# Altium PCB Controller_Ryuji.PcbDoc
Units mm, origin at the board's own origin, x right, y up, seen from the top; angles counter-clockwise.
Board outline 83.98 x 84 mm, 6 copper layers (TOP, 5V, VS, SIGNALS, GND, BOTTOM), stack 1.597 mm thick; 43 components, 116 nets, 314 pads, 11 vias.
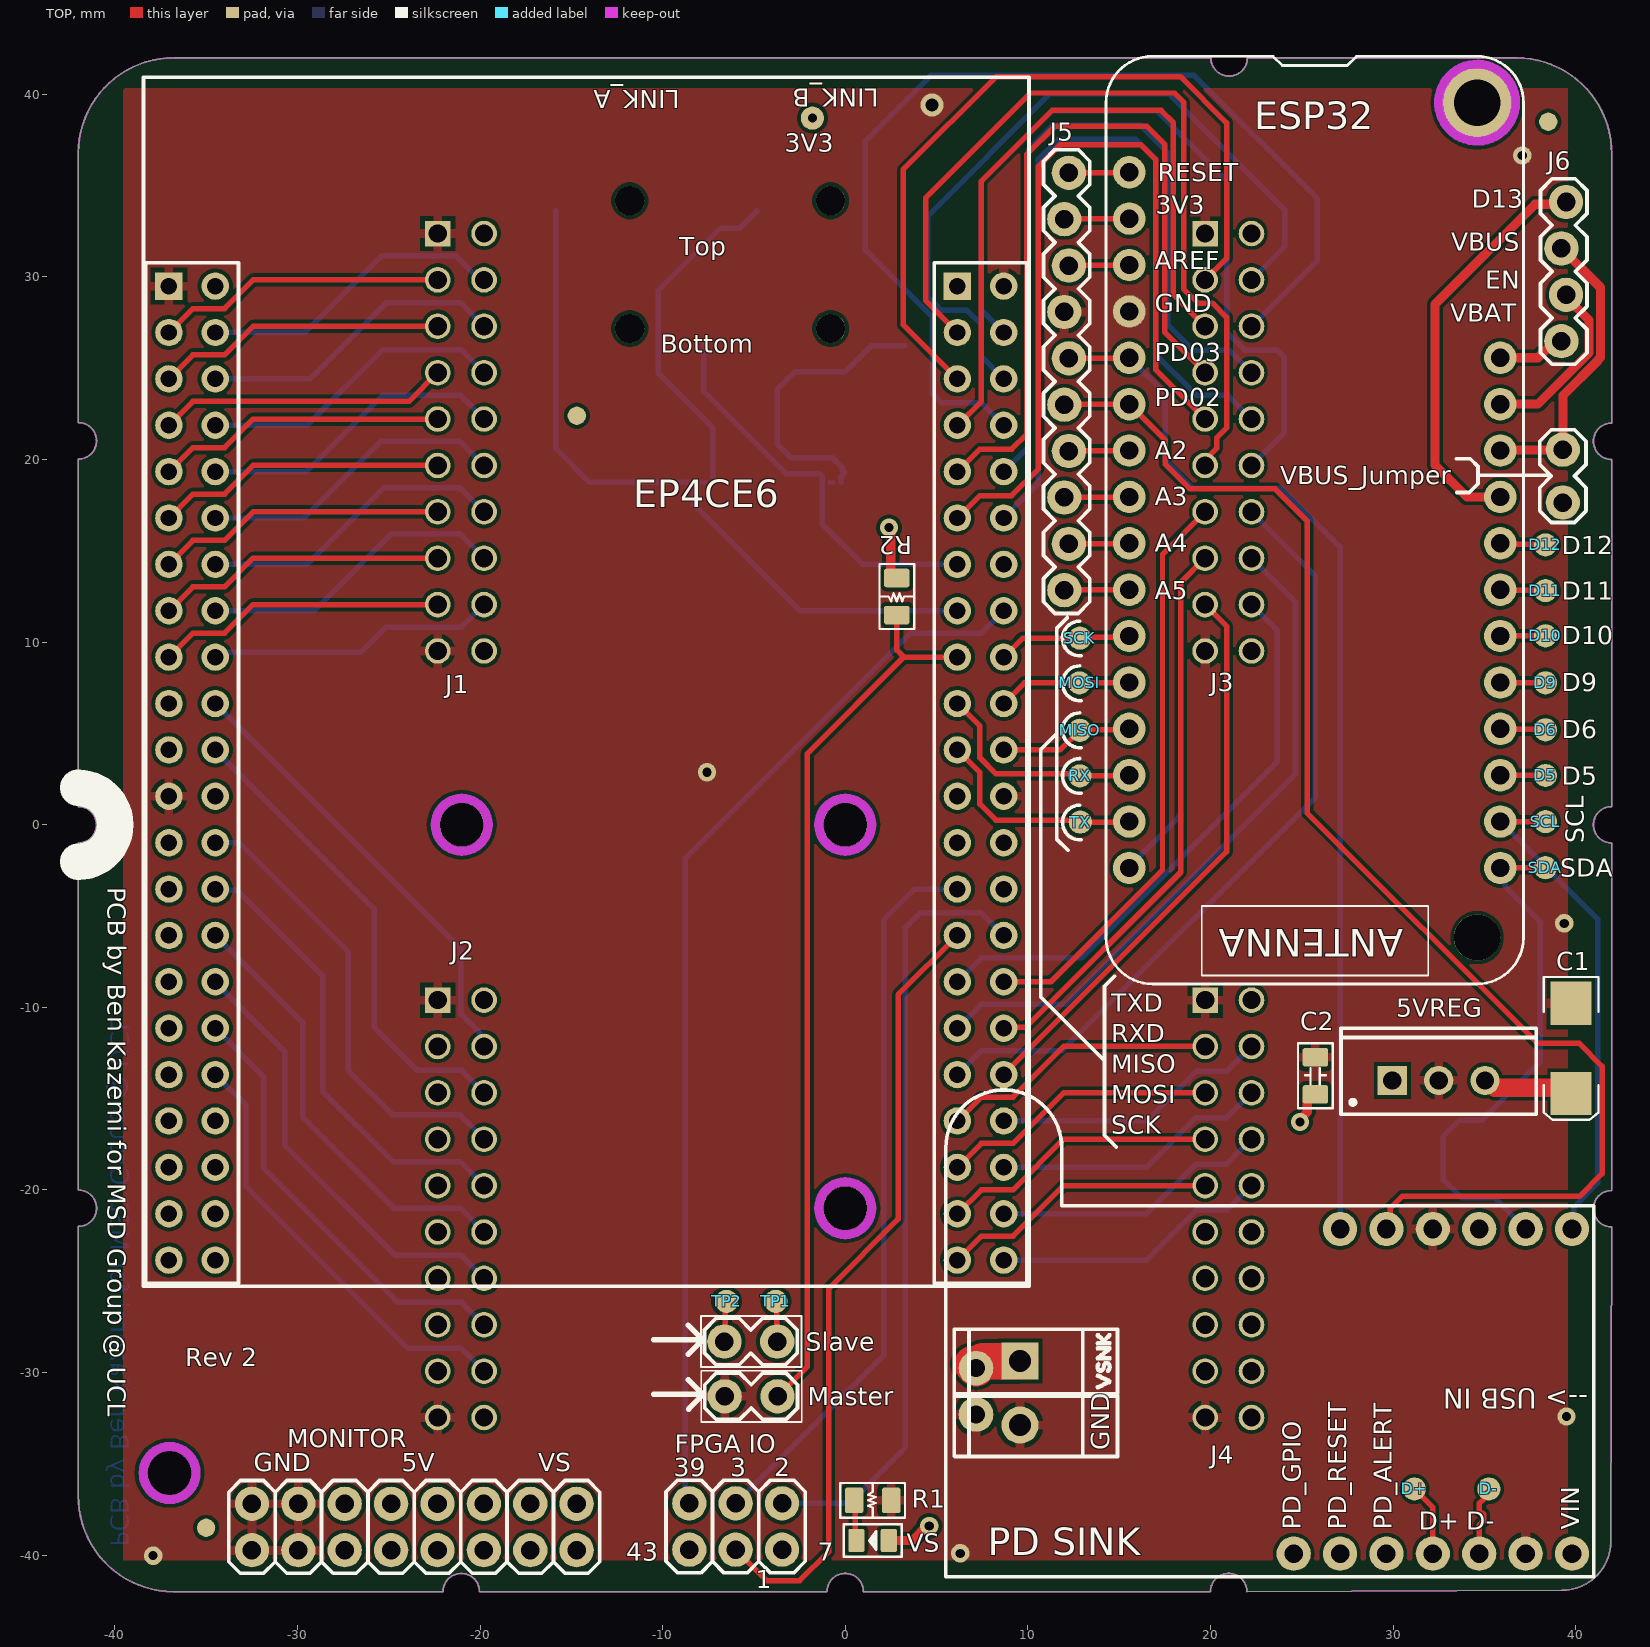
[diagram p0: TOP view]
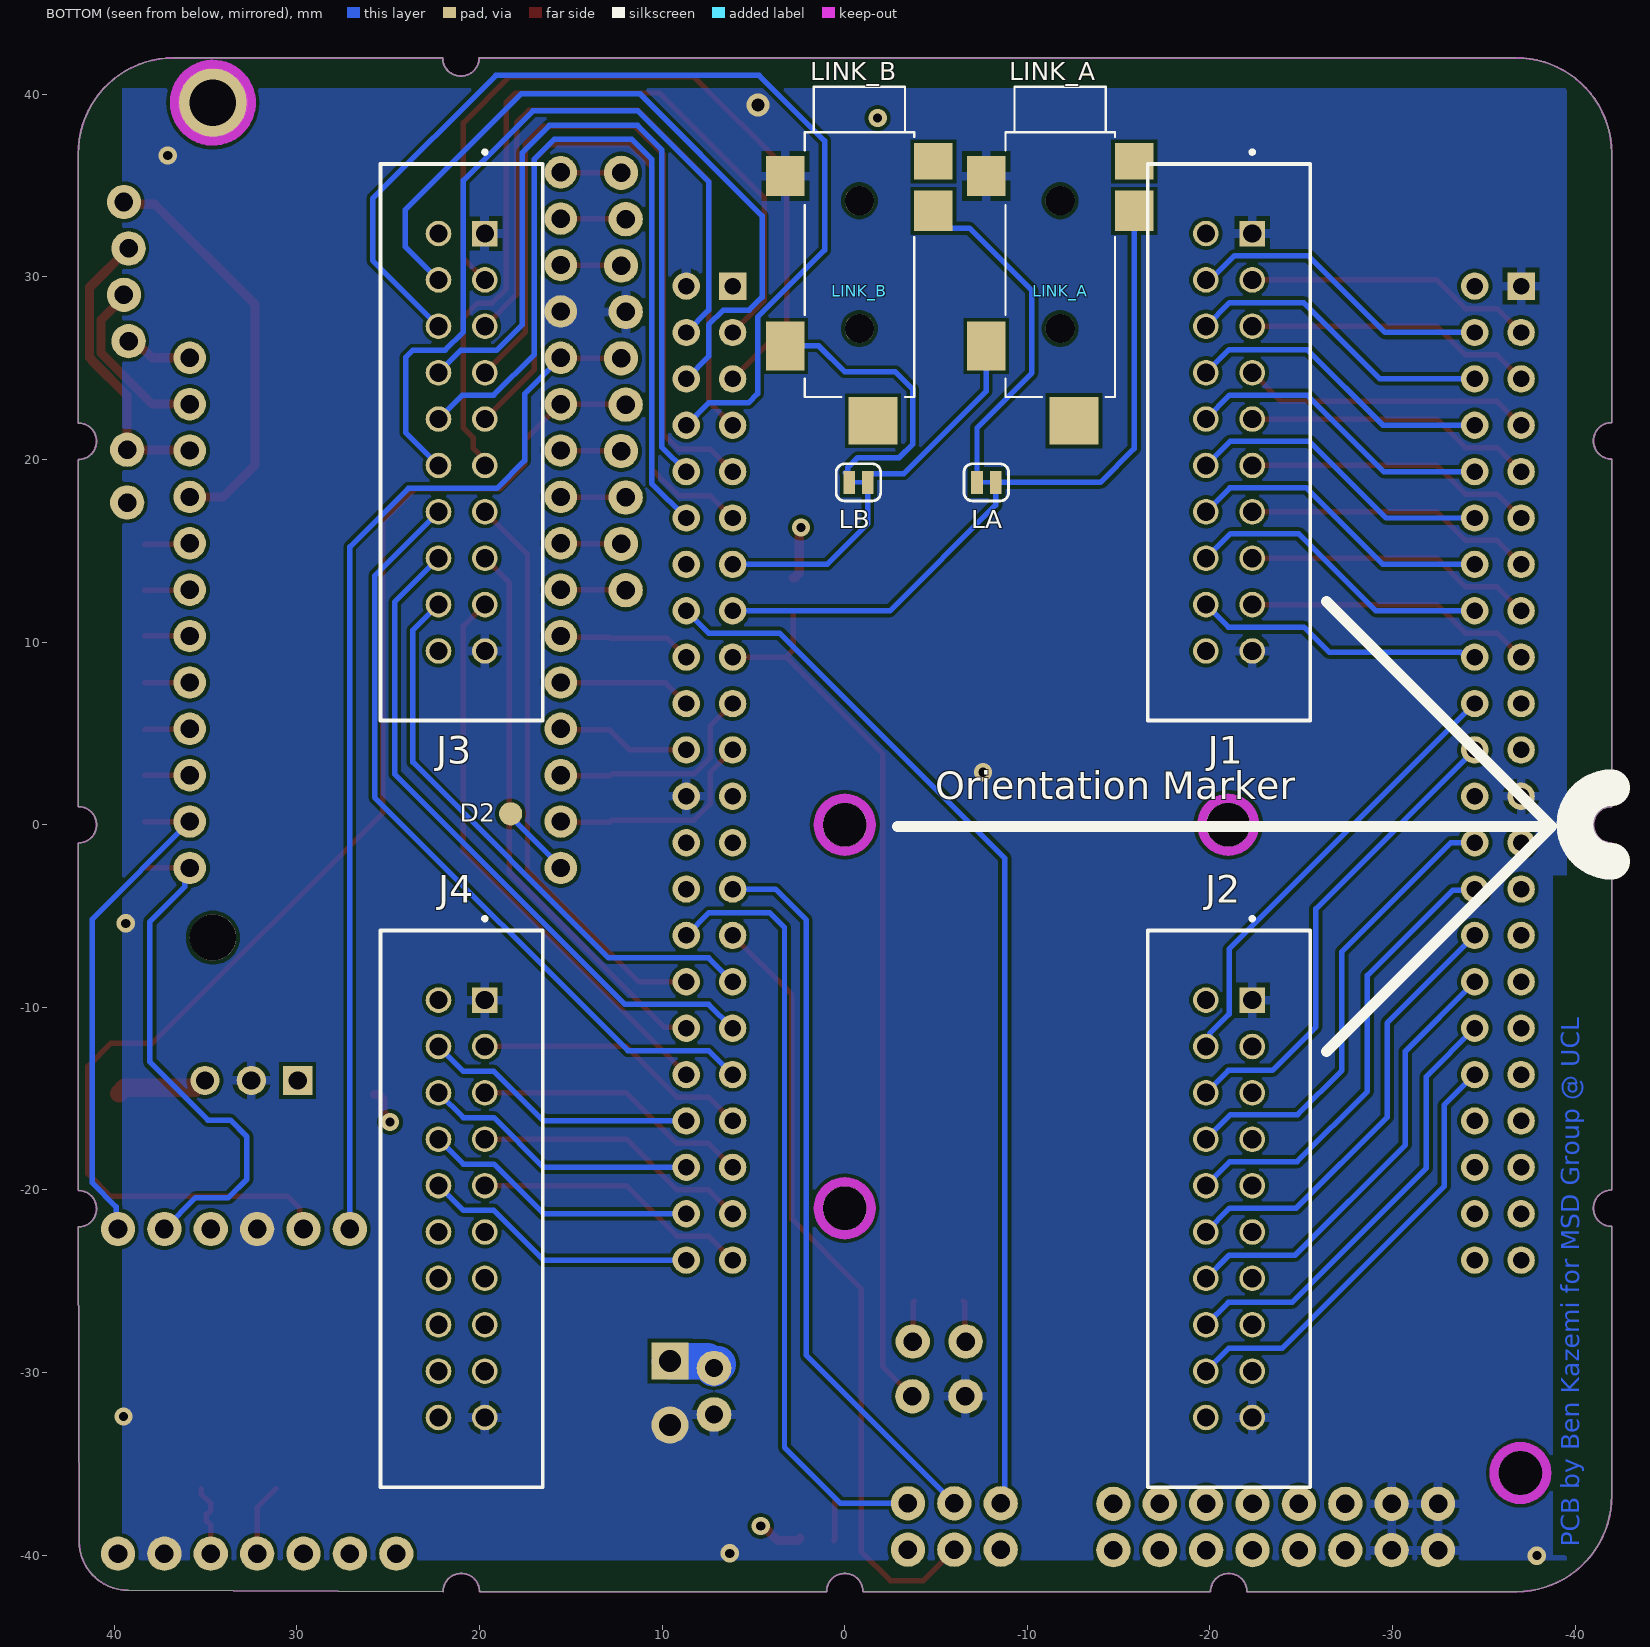
[diagram p1: BOTTOM view, seen from below]
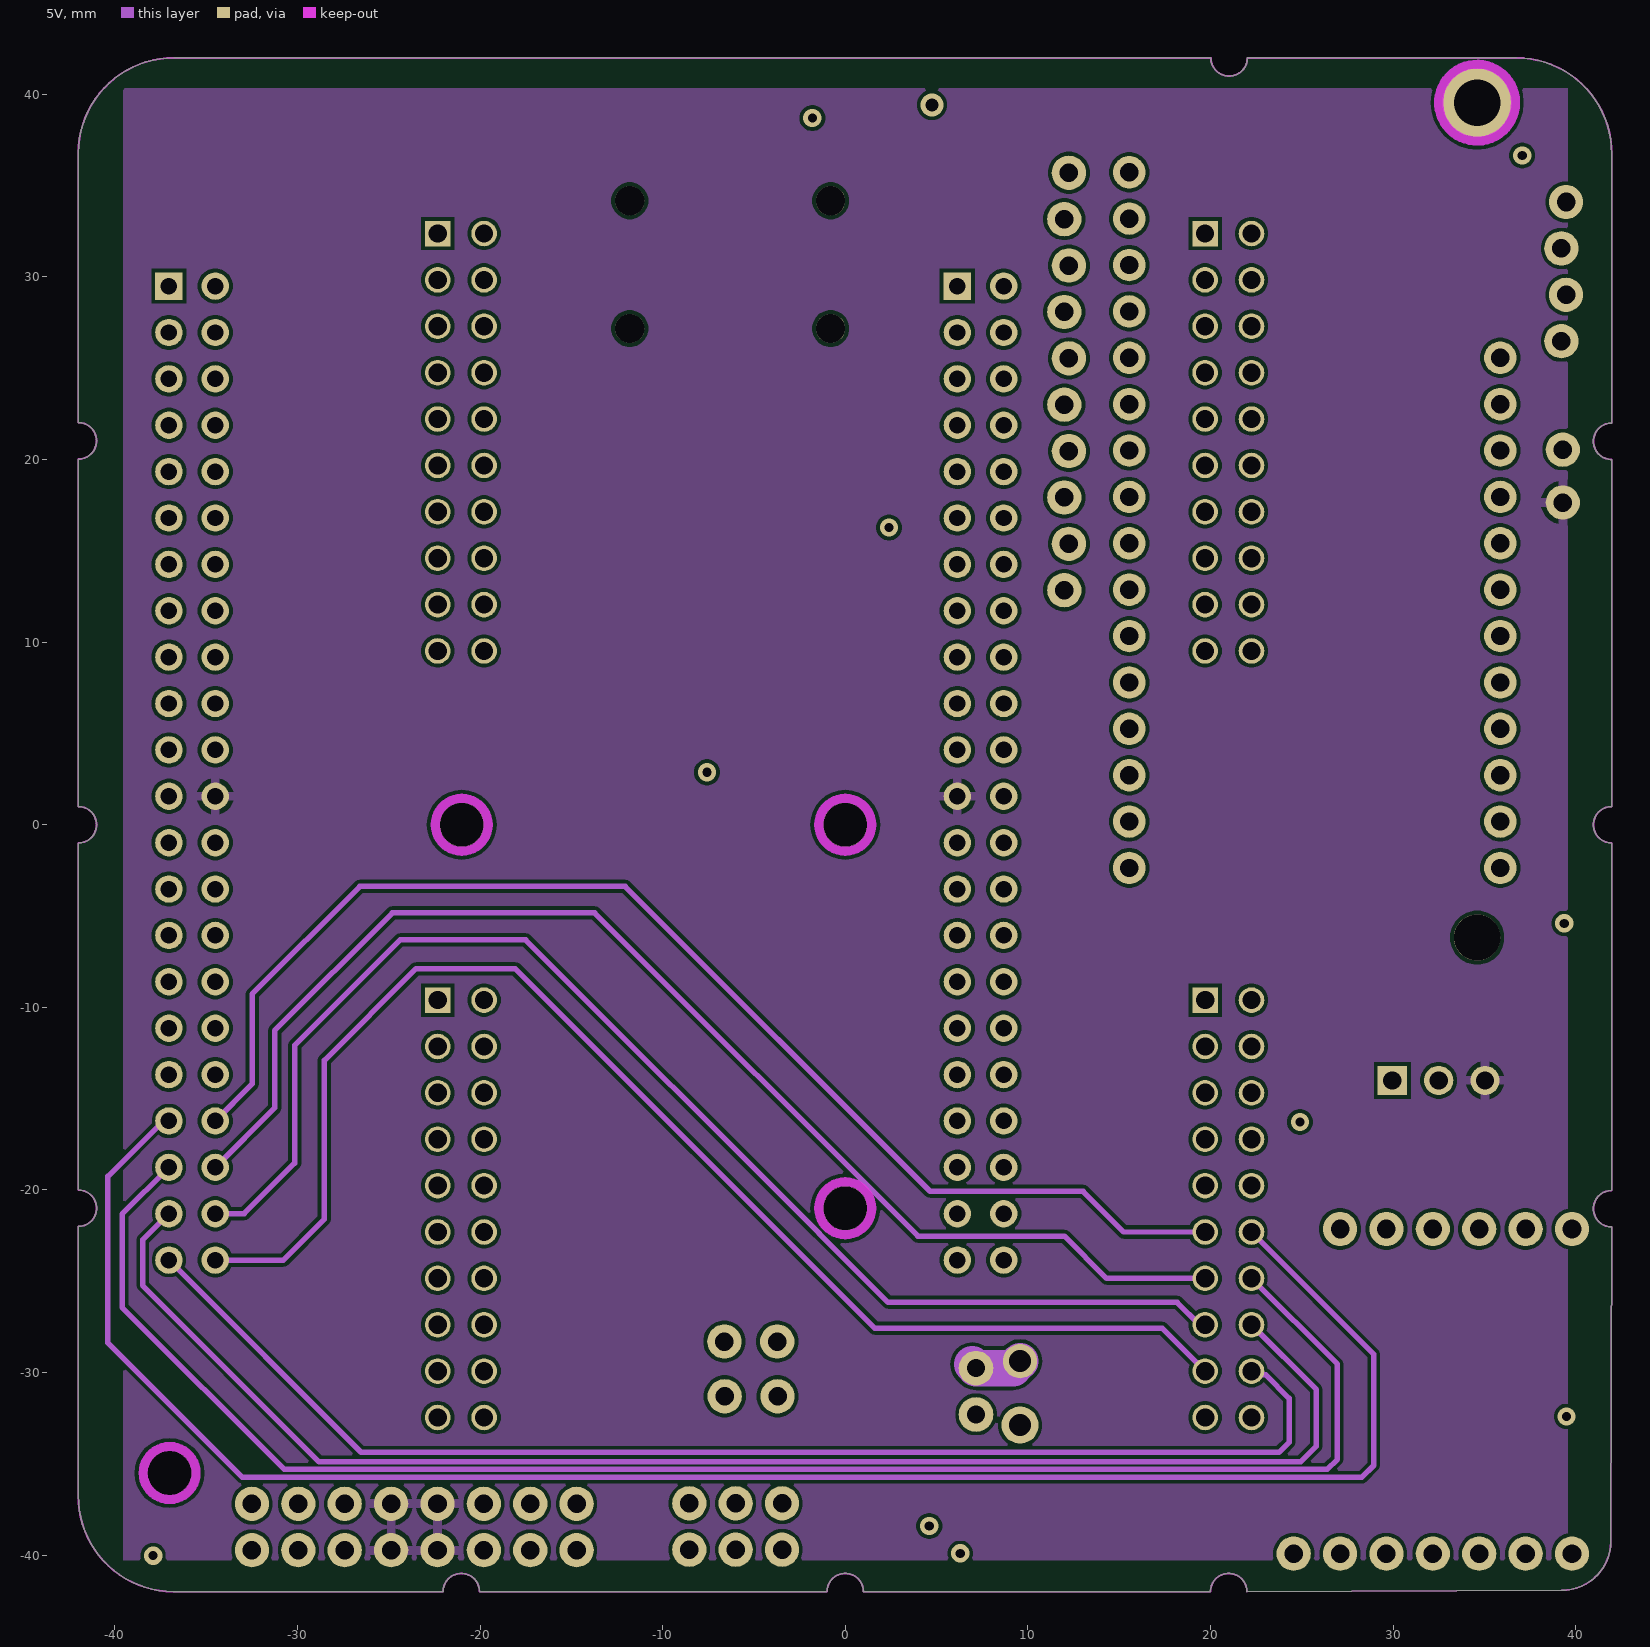
[diagram p2: 5V]
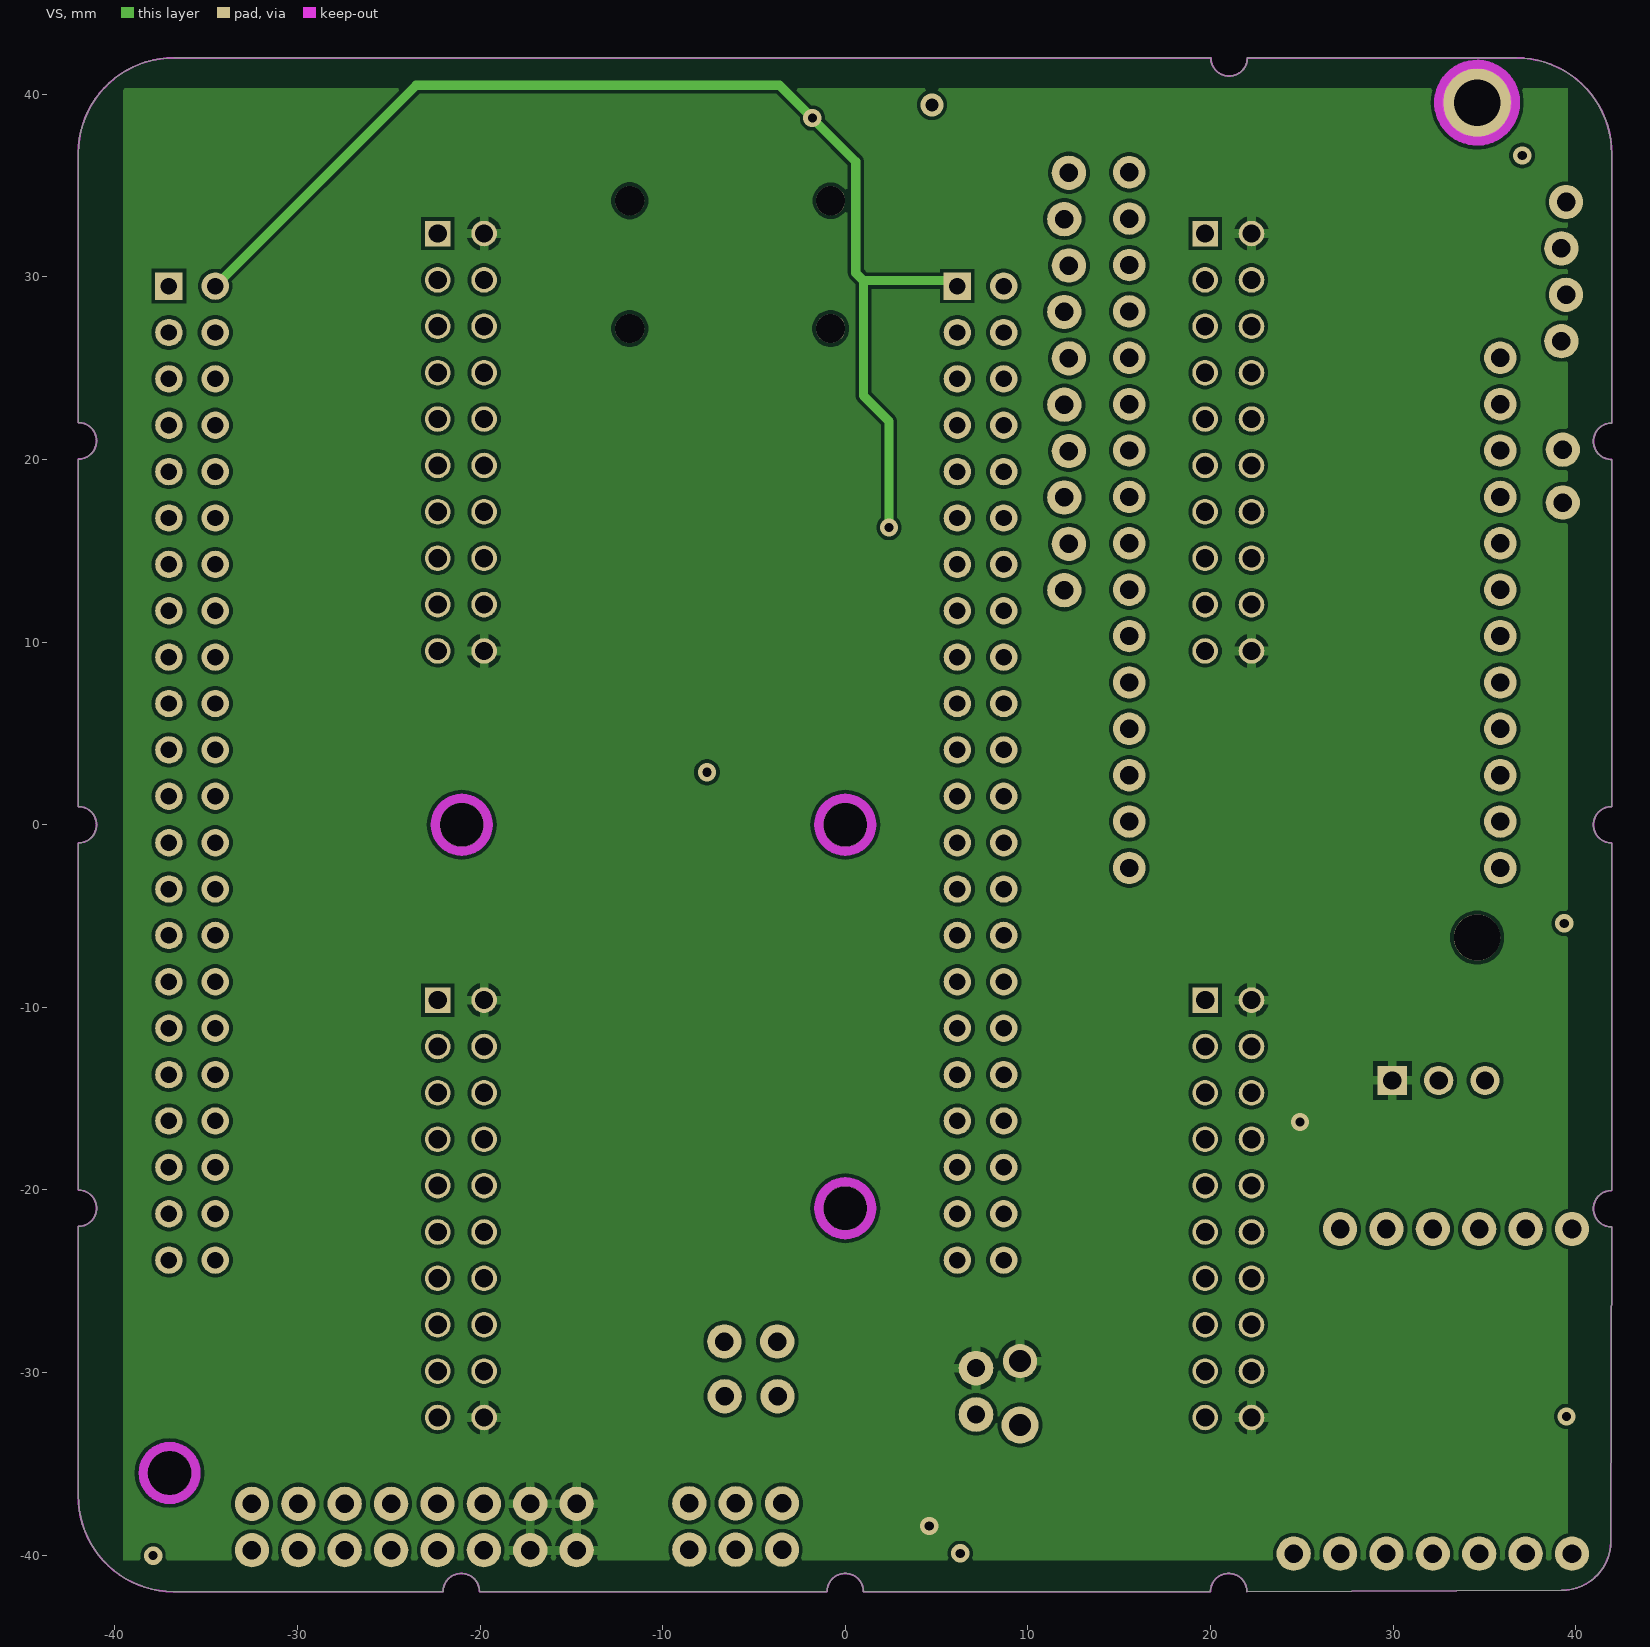
[diagram p3: VS]
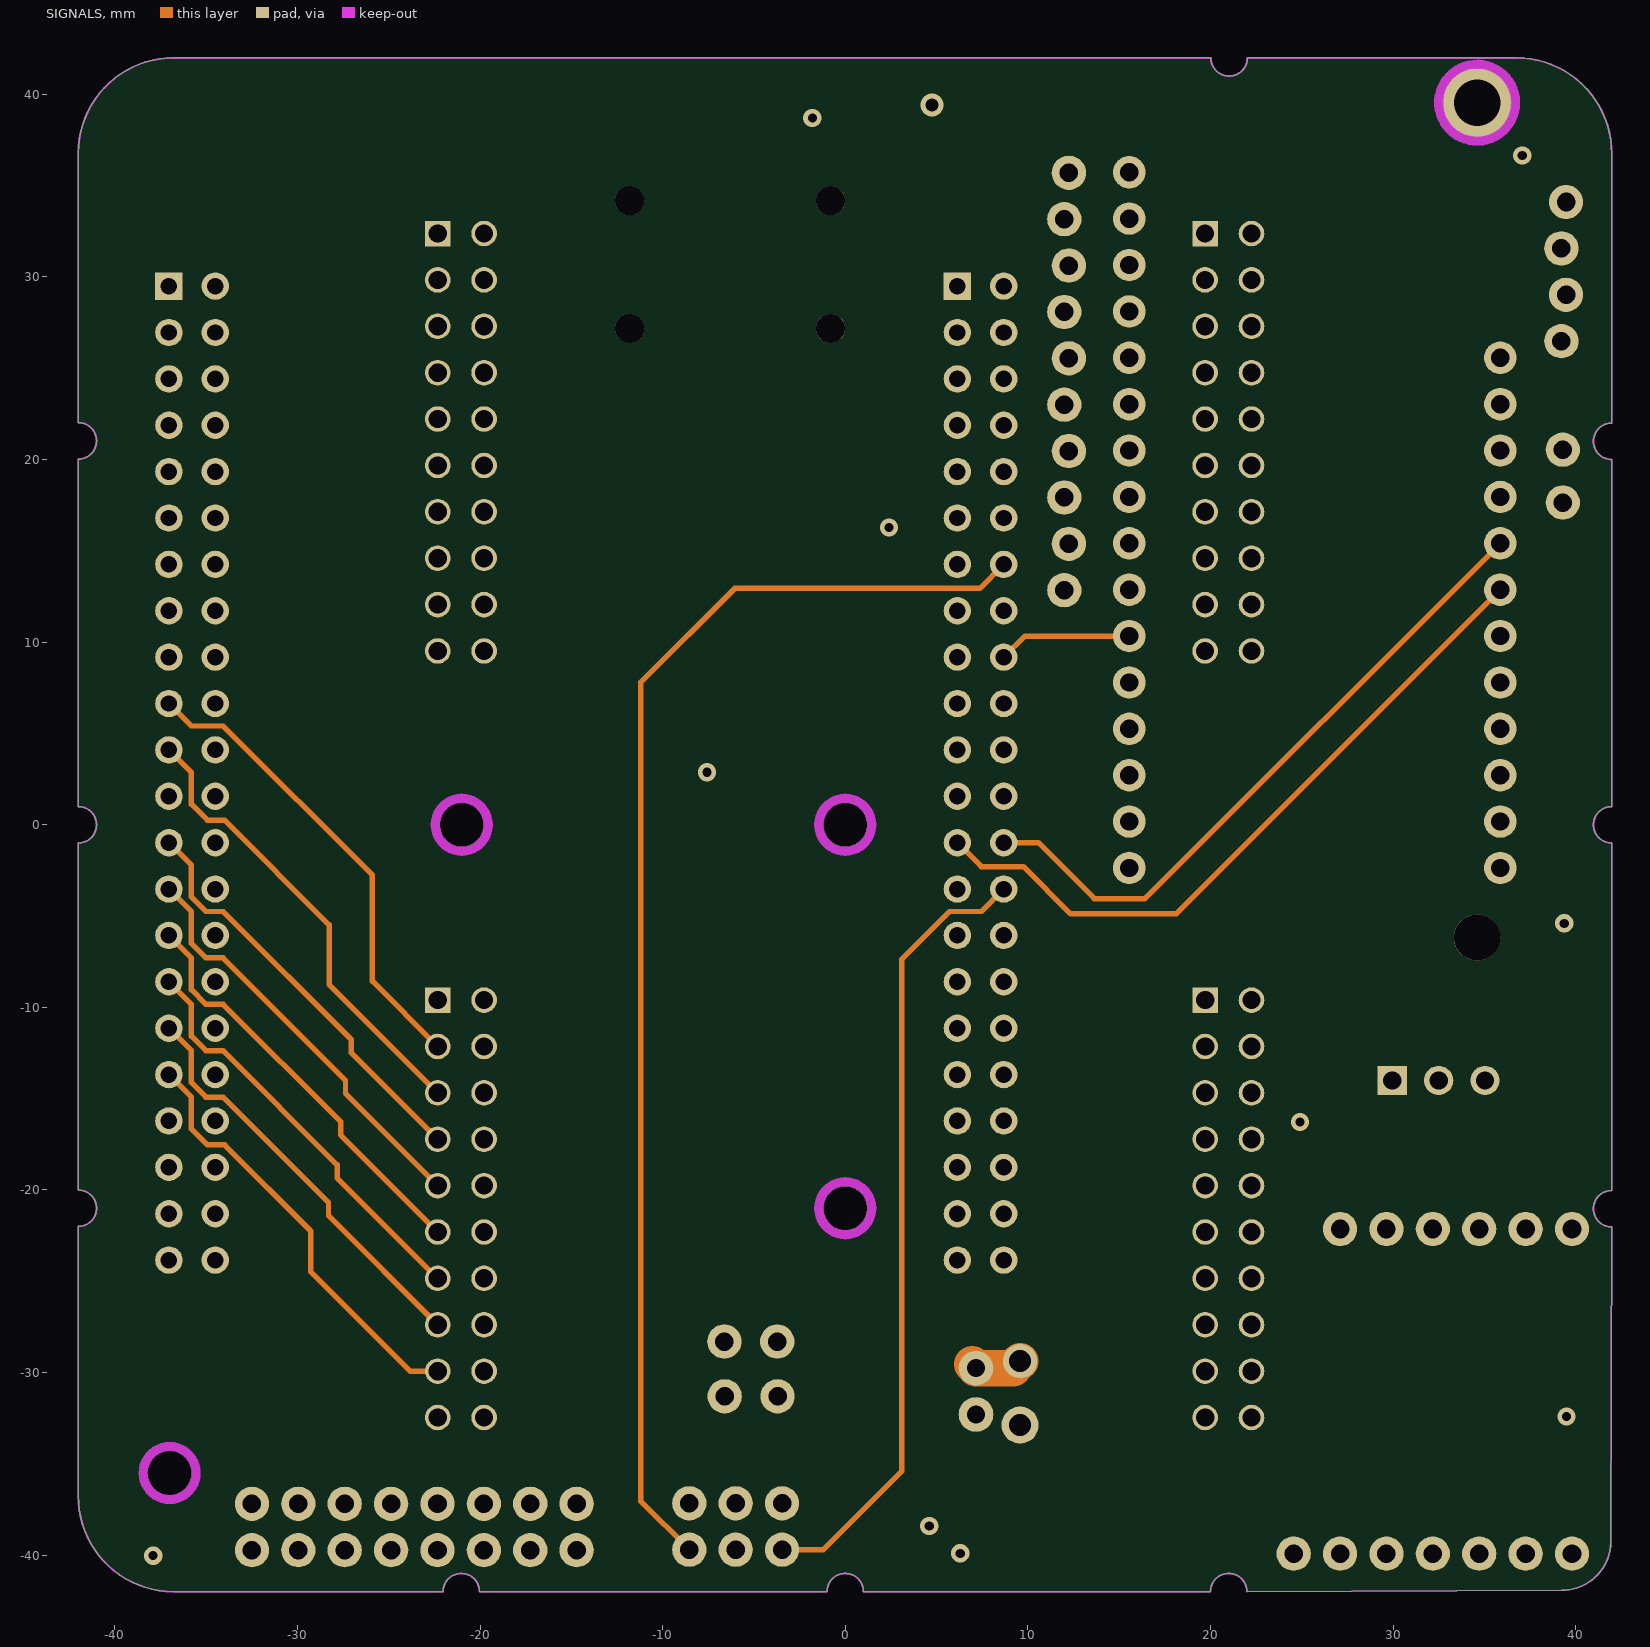
[diagram p4: SIGNALS]
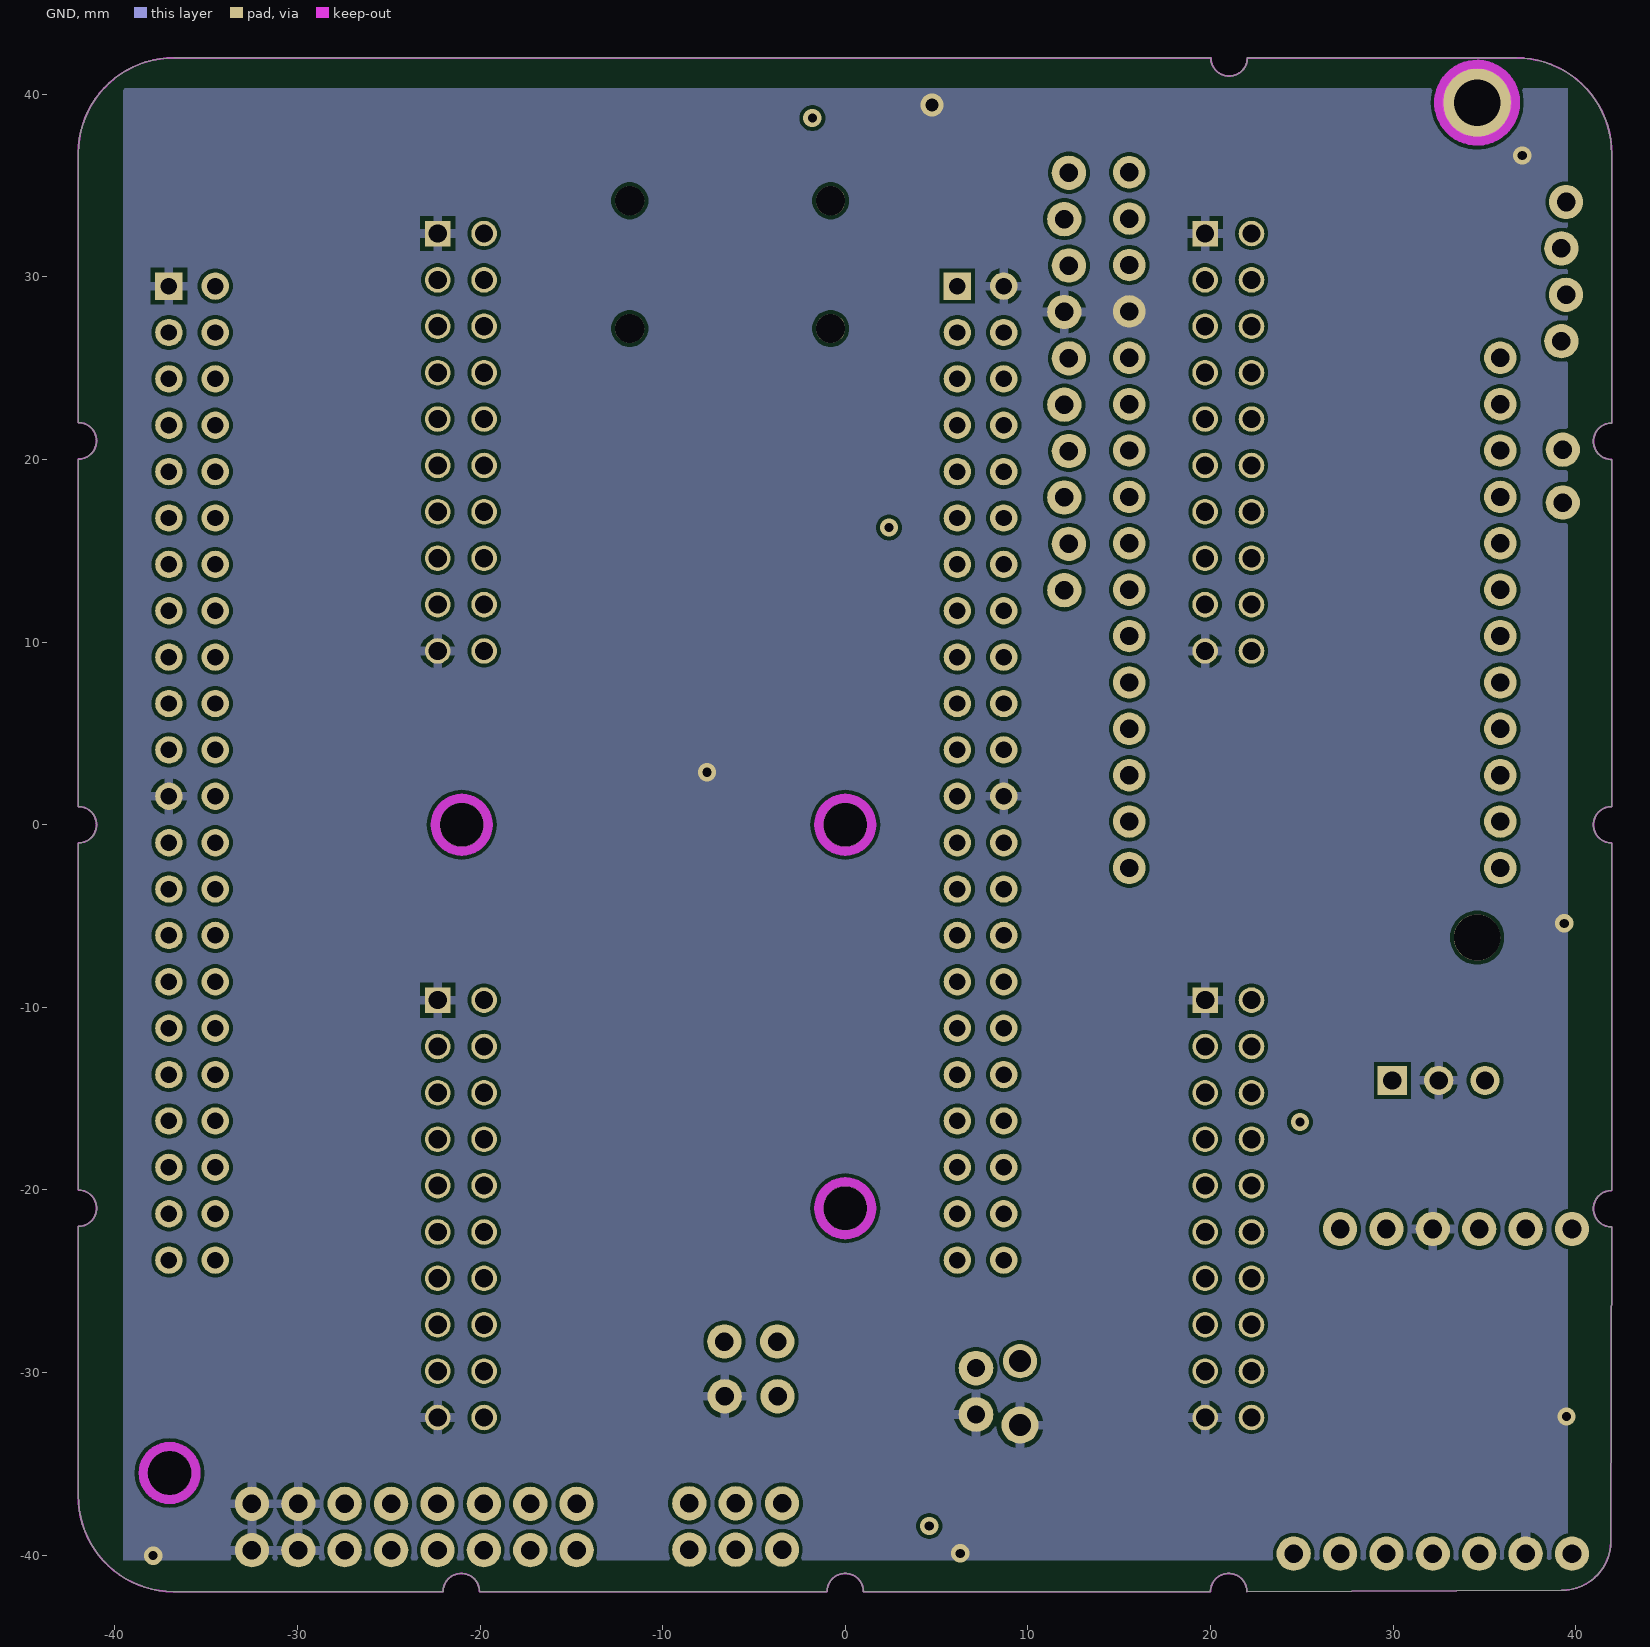
[diagram p5: GND]

## Layer stack, top to bottom
Top Mask: solder mask 0.015, Solder Resist, Dk 3.8
TOP: signal copper 0.035
Dielectric 1: prepreg 0.1, 2313, Dk 4.05
5V: signal copper 0.0175
Core 1: core 0.565, FR-4, Dk 4.5
VS: signal copper 0.0175
Dielectric 2: prepreg 0.127, 2116, Dk 4.25
SIGNALS: signal copper 0.0175
Core 2: core 0.565, FR-4, Dk 4.5
GND: signal copper 0.0175
Dielectric 3: prepreg 0.1, 2313, Dk 4.05
BOTTOM: signal copper 0.035
Bottom Mask: solder mask 0.015, Solder Resist, Dk 3.8

## Board outline
-42,-36.75 -42,-22 ccw(c-42,-21) -42,-20 -42,-1 ccw(c-42,0) -42,1 -42,20.025 ccw(c-42,21.025) -42,22.025 -42,36.775 -42,36.8 cw(c-36.775,36.775) -36.75,42 20.025,42 ccw(c21.025,42) 22.025,42 36.775,42 cw(c36.75,36.775) 41.975,36.75 41.975,22 ccw(c41.975,21) 41.975,20 41.975,1 ccw(c41.975,0) 41.975,-1 41.975,-20.025 ccw(c41.975,-21.025) 41.975,-22.025 41.927,-39.256 cw(c39.245,-39.243) 39.233,-41.925 22,-42 ccw(c21,-42) 20,-42 1,-42 ccw(c0,-42) -1,-42 -20.025,-42 ccw(c-21.025,-42) -22.025,-42 -36.775,-42 -36.8,-42 cw(c-36.775,-36.775)

## Design rules (kind name [scope] priority, off if disabled: settings)
BoardOutlineClearance [All] p1: gap=0.2 ignorepadtopadclearanceinfootprint=FALSE
Clearance [All] p1: gap=0.2 ignorepadtopadclearanceinfootprint=FALSE except(0.12: Arc-Arc Arc-Track Track-Track; 0.127: Arc-SMDPad Track-SMDPad SMDPad-SMDPad; 0.254: Arc-Via Arc-Text Track-Via Track-Text SMDPad-Via SMDPad-Text THPad-Via THPad-Text Via-Via Via-Text Fill-Text Poly-Text Region-Text Text-Text; 0.3: THPad-THPad; 0.33: Arc-THPad Track-THPad SMDPad-THPad)
HoleSize [All] p1: absolutevalues=TRUE maxlimit=6.3 minlimit=0.2 maxpercent=80.000 minpercent=20.000
MinimumAnnularRing [All] p1: minimumring=0.2
PlaneClearance [All] p1: clearance=0.5
PlaneConnect [All] p1: planeconnectstyle=Relief reliefexpansion=0.5 reliefentries=4 reliefconductorwidth=0.254 reliefairgap=0.254
PolygonConnect PolygonConnect_1 [All] p1: thpad.connectstyle=Relief thpad.reliefconductorwidth=0.5 thpad.reliefentries=4 thpad.polygonreliefangle="90 Angle" thpad.airgapwidth=0.254 smdpad.connectstyle=Relief smdpad.reliefconductorwidth=0.5 smdpad.reliefentries=4 smdpad.polygonreliefangle="90 Angle" smdpad.airgapwidth=0.254 via.connectstyle=Direct via.reliefconductorwidth=0.508 via.reliefentries=4 via.polygonreliefangle="90 Angle" via.airgapwidth=0.254
RoutingCorners [All] p1: cornerstyle=Round minsetback=2.54 maxsetback=2.54
RoutingVias [All] p1: holewidth=0.5 width=1 viastyle="Through Hole" minholewidth=0.2 minwidth=0.45 maxholewidth=1 maxwidth=2
SilkToSilkClearance [All] p1 off: silktosilkclearance=0.1
SilkToSolderMaskClearance [IsPad] p1 off: minsilkscreentomaskgap=0.1 clearancetoexposedcopper=TRUE
SolderMaskExpansion [All] p1: expansion=0.1 istentingtop=FALSE
Width [All] p1: maxlimit=2.54 minlimit=0.09 preferedwidth=0.3
24 further rules are at their usual default settings.

## Components (designator, comment, footprint, x,y, rotation, side; value= is the part's Value field where it differs from the comment)
3V3 "TEST-POINT3X5" PAD.03X.05 -1.8,38.7 r90 top
5VREG "OKI-78SR-5" OOKA-78SR 32.5,-14 r0 top
C1 "GRM32ER71A476ME15L" EIA6032-NOM 39.75,-12.25 r270 top
C2 "0.33uF" CAP0805 25.75,-13.75 r180 top
D2 "TEST-POINT3X5" PAD.03X.05 18.3,0.6 r180 bottom
D5 "TEST-POINT3X5" PAD.03X.05 38.35,2.7 r0 top
D6 "TEST-POINT3X5" PAD.03X.05 38.35,5.2 r90 top
D9 "TEST-POINT3X5" PAD.03X.05 38.35,7.775 r90 top
D10 "TEST-POINT3X5" PAD.03X.05 38.35,10.35 r180 top
D11 "TEST-POINT3X5" PAD.03X.05 38.35,12.825 r90 top
D12 "TEST-POINT3X5" PAD.03X.05 38.35,15.325 r180 top
D+ "TEST-POINT3X5" PAD.03X.05 31.175,-36.375 r90 top
D- "TEST-POINT3X5" PAD.03X.05 35.25,-36.375 r90 top
EP4CE6 "Waveshare FPGA" "EP4CE6 WAVESHARE FPGA" -37.04,29.5 r270 top
ESP32 "Adafruit Feather nRF52480" "FEATHER BLE NRF52480" 16.825,39.545 r270 top (schematic designator nRF52480)
"FPGA IO" "FPGA IO" 2X3 -8.54,-39.7 r0 top
J1 "TSSH-110-01-L-D" SAMTEC_TSSH-110-01-L-D -22.317,32.379 r270 bottom locked
J2 "TSSH-110-01-L-D" SAMTEC_TSSH-110-01-L-D -22.317,-9.601 r270 bottom
J3 "TSSH-110-01-L-D" SAMTEC_TSSH-110-01-L-D 19.708,32.379 r270 bottom locked
J4 "TSSH-110-01-L-D" SAMTEC_TSSH-110-01-L-D 19.71,-9.601 r270 bottom locked
J5 "" "1X10 _ LOCK - header" 12.123,35.705 r270 top
J6 "Pulled out pins" "1X04_LOCK - header" 39.348,26.485 r90 top
LA "Normally closed trace jumper    This jumper has a trace between two pads so it's normally closed (NC). Use a razor knife to open the connection. For best results follow the IPC guidelines for cutting traces: Cutout at least 0.063 mm (0.005 in).  Remove all loose material to clean up the cut area.  Seal the cut with an approved epoxy.       Reapply solder to reclose the connection." SMT-JUMPER_2_NC_TRACE_SILK -7.75,18.75 r180 bottom net-tie
LB "Normally closed trace jumper    This jumper has a trace between two pads so it's normally closed (NC). Use a razor knife to open the connection. For best results follow the IPC guidelines for cutting traces: Cutout at least 0.063 mm (0.005 in).  Remove all loose material to clean up the cut area.  Seal the cut with an approved epoxy.       Reapply solder to reclose the connection." SMT-JUMPER_2_NC_TRACE_SILK -0.75,18.75 r180 bottom net-tie
LINK_A "35RASMT4BHNTRX" SWITCHCRAFT_35RASMT4BHNTRX -11.8,30.675 r270 bottom
LINK_B "35RASMT4BHNTRX" SWITCHCRAFT_35RASMT4BHNTRX -0.8,30.675 r270 bottom
Master "Connect for Master" 1X02_LOCK_ -3.882,-31.3 r180 top
MISO "TEST-POINT3X5" PAD.03X.05 12.85,5.175 r180 top
MONITOR "Multi connection point. Often used as Generic Header-pin footprint for 0.1 inch spaced/style header connections    You can populate with any combo of single row headers, but if you'd like an exact match, check this:  Header - 2x8 (Male, 0.1\") (PRT-13156)       On any of the 0.1 inch spaced packages, you can populate with these:  Break Away Headers - Straight (PRT-00116)   Break Away Male Headers - Right Angle (PRT-00553)   Female Headers (PRT-00115)   Break Away Headers - Machine Pin (PRT-00117)   Break Away Female Headers - Swiss Machine Pin (PRT-00743)" 2X8 -14.71,-37.185 r180 top
MOSI "TEST-POINT3X5" PAD.03X.05 12.828,7.772 r180 top
"PD SINK" "Sparkfun STUSB4500" "SPARKFUN STUSB4500" 39.801,-22.136 r180 top
R1 "3K BOURNS CRT0805-BY-3001ELF" RES-0805 1.5,-37 r90 top
R2 "10K" RES-0805 2.825,12.5 r180 top
RX "TEST-POINT3X5" PAD.03X.05 12.85,2.675 r90 top
SCK "TEST-POINT3X5" PAD.03X.05 12.85,10.225 r90 top
SCL "TEST-POINT3X5" PAD.03X.05 38.35,0.175 r180 top
SDA "TEST-POINT3X5" PAD.03X.05 38.35,-2.35 r180 top
Slave "Connect for Slave" 1X02_LOCK_ -3.9,-28.3 r180 top
TP1 "TEST-POINT3X5" PAD.03X.05 -3.8,-26.1 r90 top
TP2 "TEST-POINT3X5" PAD.03X.05 -6.5,-26.1 r90 top
TX "TEST-POINT3X5" PAD.03X.05 12.875,0.15 r90 top
VBUS_Jumper "Short to connect  5V to VBUS of feather" 1X02_LOCK_ 39.3,17.825 r90 top
VS "Red WURTH 150080RS75000" "LED-0805 - RED" 1.5,-39.2 r180 top

## Footprints (in the part's own frame and the unit in brackets; to place one, negate y for a bottom-side part, rotate by r counter-clockwise, add the part's x,y. Pads: shape width x height; smd on the part's side, far side on the other; paste and mask are expansions set on the pad)
1X02_LOCK_ [mil]
  round 74 hole 40: 1(-7,0) 2(107,0)
  silkscreen extent -50,-50 150,50, body extent -50,-49 150,49, height 241
"1X04_LOCK - header" [mil]
  round 74 hole 40: 1(0,5) 2(100,-5) 3(200,5) 4(300,-5)
  silkscreen extent -50,-50 350,50, body extent -47,-51 353,47, height 122
"1X10 _ LOCK - header" [mil]
  round 74 hole 40: 1(0,5) 2(100,-5) 3(200,5) 4(300,-5) 5(400,5) 6(500,-5) 7(600,5) 8(700,-5) 9(800,5) 10(900,-5)
  silkscreen extent -50,-50 950,50, body extent -50,-48 950,50, height 330
2X3 [mil]
  round 74 hole 40: 1(0,0) 2(0,100) 3(100,0) 4(100,100) 5(200,0) 6(200,100)
  silkscreen extent -50,-50 250,150
2X8 [mil]
  round 74 hole 40: 1(0,0) 2(0,100) 3(100,0) 4(100,100) 5(200,0) 6(200,100) 7(300,0) 8(300,100) 9(400,0) 10(400,100) 11(500,0) 12(500,100) 13(600,0) 14(600,100) 15(700,0) 16(700,100)
  silkscreen extent -50,-50 750,150
CAP0805 [mil]
  rrect25% 55x40 smd: 1(0,40) 2(0,-40)
  silkscreen extent -38,-70 38,70, body extent -25,-39 25,39, height 49
EIA6032-NOM [mm]
  rect 2.37x2.23 smd: A(2.47,0) C(-2.47,0)
  silkscreen extent -3.91,-1.5 3.91,1.5, body extent -3.12,-1.6 3.07,1.61, height 2.22
"EP4CE6 WAVESHARE FPGA" [mm]
  rect 1.5x1.5 hole 0.9: 1(0,0) 45(0,43.18)
  round 1.5 hole 0.9: 2(0,2.54) 3(2.54,0) 4(2.54,2.54) 5(5.08,0) 6(5.08,2.54) 7(7.62,0) 8(7.62,2.54) 9(10.16,0) 10(10.16,2.54) 11(12.7,0) 12(12.7,2.54) 13(15.24,0) 14(15.24,2.54) 15(17.78,0) 16(17.78,2.54) 17(20.32,0) 18(20.32,2.54) 19(22.86,0) 20(22.86,2.54) 21(25.4,0) 22(25.4,2.54) 23(27.94,0) 24(27.94,2.54) 25(30.48,0) 26(30.48,2.54) 27(33.02,0) 28(33.02,2.54) 29(35.56,0) 30(35.56,2.54) 31(38.1,0) 32(38.1,2.54) 33(40.64,0) 34(40.64,2.54) 35(43.18,0) 36(43.18,2.54) 37(45.72,0) 38(45.72,2.54) 39(48.26,0) 40(48.26,2.54) 41(50.8,0) 42(50.8,2.54) 43(53.34,0) 44(53.34,2.54) 46(0,45.72) 47(2.54,43.18) 48(2.54,45.72) 49(5.08,43.18) 50(5.08,45.72) 51(7.62,43.18) 52(7.62,45.72) 53(10.16,43.18) 54(10.16,45.72) 55(12.7,43.18) 56(12.7,45.72) 57(15.24,43.18) 58(15.24,45.72) 59(17.78,43.18) 60(17.78,45.72) 61(20.32,43.18) 62(20.32,45.72) 63(22.86,43.18) 64(22.86,45.72) 65(25.4,43.18) 66(25.4,45.72) 67(27.94,43.18) 68(27.94,45.72) 69(30.48,43.18) 70(30.48,45.72) 71(33.02,43.18) 72(33.02,45.72) 73(35.56,43.18) 74(35.56,45.72) 75(38.1,43.18) 76(38.1,45.72) 77(40.64,43.18) 78(40.64,45.72) 79(43.18,43.18) 80(43.18,45.72) 81(45.72,43.18) 82(45.72,45.72) 83(48.26,43.18) 84(48.26,45.72) 85(50.8,43.18) 86(50.8,45.72) 87(53.34,43.18) 88(53.34,45.72)
  silkscreen extent -11.44,-1.39 54.78,47.11, body extent -1.35,-1.35 54.56,46.99, height 8.65
"FEATHER BLE NRF52480" [mil]
  round 70 hole 39.37: 1(150,-50) 2(250,-50) 3(350,-50) 4(450,-50) 5(550,-50) 6(650,-50) 7(750,-50) 8(850,-50) 9(950,-50) 10(1050,-50) 11(1150,-50) 12(1250,-50) 13(1350,-50) 14(1450,-50) 15(1550,-50) 16(1650,-50) 17(1650,750) 18(1550,750) 19(1450,750) 20(1350,750) 21(1250,750) 22(1150,750) 23(1050,750) 24(950,750) 25(850,750) 26(750,750) 27(650,750) 28(550,750)
  round 149.61 hole 100.39 unplated: 2(0,700)
  round 100 hole 100 unplated: MH1(1800,700)
  silkscreen extent -100,-100 1900,800, body extent 91,-95 1711,799, height 335
"LED-0805 - RED" [mil]
  rrect25% 35x50 smd: +(-35,0) -(35,0)
  silkscreen extent -63,-35 63,35, body extent -39,-25 39,25, height 16
OOKA-78SR [mm] "TO, Thru-Hole, Vertical, Heatsink Mounted; 3 In-Line Leads; Pitch 2.54 mm"
  round 1.6 hole 1: GND(0,0) OUT(2.54,0)
  rect 1.6x1.6 hole 1: IN(-2.54,0)
  silkscreen extent -5.35,-1.85 5.35,2.85, body extent -5.21,-2.79 5.21,4.94, height 16.58
PAD.03X.05 [mm]
  rrect100% 1.27x1.27 smd paste-0.635: P$1(0,0)
RES-0805 [mil]
  rrect25% 55x40 smd: 1(0,40) 2(0,-40)
  silkscreen extent -38,-70 38,70, body extent -24,-40 26,38, height 24
SAMTEC_TSSH-110-01-L-D [mm]
  rect 1.4x1.4 hole 1: 01(0,0)
  round 1.4 hole 1: 02(0,-2.54) 03(2.54,0) 04(2.54,-2.54) 05(5.08,0) 06(5.08,-2.54) 07(7.62,0) 08(7.62,-2.54) 09(10.16,0) 10(10.16,-2.54) 11(12.7,0) 12(12.7,-2.54) 13(15.24,0) 14(15.24,-2.54) 15(17.78,0) 16(17.78,-2.54) 17(20.32,0) 18(20.32,-2.54) 19(22.86,0) 20(22.86,-2.54)
  silkscreen extent -4.56,-5.72 26.67,3.18, body extent -3.81,-5.72 26.67,3.18, height 8.89
SMT-JUMPER_2_NC_TRACE_SILK [mil]
  rect 25x50 smd paste-25: 1(-20,0) 2(20,0)
  TOP region: -8,5 8,5 8,-5 -8,-5
  silkscreen extent -48,-40 48,40
"SPARKFUN STUSB4500" [mil]
  round 74 hole 40: 1(0,0) 2(100,0) 3(200,0) 4(300,0) 5(400,0) 6(500,0) 7(0,700) 8(100,700) 9(200,700) 10(300,700) 11(400,700) 12(500,700) 13(600,700)
  round 80 hole 47.24: 8(1190,422.8)
  round 74.8 hole 39.37: 8(1285,400) 14(1285,300)
  rect 80x80 / inner round 73.91 / far side rect 80x80 hole 47.24: 14(1190,285)
  silkscreen extent -47,-300 1350,750, body extent -60,-45 1333,747, height 335
SWITCHCRAFT_35RASMT4BHNTRX [mm]
  rect 2.2x2.1 smd: 1(-4.85,-4.05) 2(-2.95,4.05)
  rect 2.7x2.1 smd: 3(4.45,-4.05)
  rect 2x2.1 smd: 4(-5.65,4.05)
  rect 2.6x2.7 smd: 5(8.55,0.75)
  round 1.6 hole 1.6 unplated: ""(-3.5,0) ""(3.5,0)
  silkscreen extent -9.75,-3 7.25,3, body extent -9.5,-4.5 9.5,4.5, height 5.05

## Part data
5VREG: library part "Volt Reg", "Voltage Regulator", Datasheet=http://www.farnell.com/datasheets/1904473.pdf?_ga=2.85272922.296638663.1549285494-96194751.1546862067, LatestRevisionDate=29-May-2009, LatestRevisionNote="IPC-7351 Footprint Added.", PackageDescription="3-Pin Transistor Outline Package 2.54 mm Pitch, 15.1 mm Lead Span", PackageReference=D2PAK, Published=24-Mar-1999, Publisher="Altium Limited"
C1: library part "CAP ELECTRO", PROD_ID=CAP-09538
C2: library part "CAP CERAMIC", PROD_ID=CAP-08280
EP4CE6: library part EP4CE6, Package=None, Availability=Unavailable, MF="{'manufacturer': u'TE Connectivity'}", MP=7-534206-2, Price=None
ESP32: library part FEATHERWING_NODIM, DeviceName=_NODIM, DeviceSetName=FEATHERWING, GateName_1=G$1, LibraryName=microbuilder, SymbolName_1=MICROSHIELD
"FPGA IO": library part CONN_03X22X3_SILK_MALE_PTH, PROD_ID=CONN-09701
J1 J2 J3 J4: Package=None, MP=TSSH-110-01-L-D, Price=None, System=Connector
J5: library part CONN_10LOCK_1
J6: library part CONN_04LOCK, PROD_ID=CONN-09696
LA LB: library part JUMPER-SMT_2_NC_TRACE_SILK
LINK_A LINK_B: "Conn 3.5MM Stereo Jack F 3 POS Solder RA SMD 5 Terminal 1 Port T/R", Package=None, Availability=Unavailable, MF="{'manufacturer': u'Switchcraft'}", MP=35RASMT4BHNTRX, Price=None
Master Slave VBUS_Jumper: library part "Header 2", "Header, 2-Pin", LatestRevisionDate=17-Jul-2002, LatestRevisionNote="Re-released for DXP Platform.", Publisher="Altium Limited"
MONITOR: library part CONN_08X2_HEADER
"PD SINK": library part "Sparkfun STUSB"
R1 R2: library part RESISTOR, MPN=CRCW0603470RFKEA, Package=0603, MF=Vishay, OC_MOUSER=71-CRCW0603-470-E3, TYPE=Resistor
VS: library part LED, Package=0805, Datasheet=https://docs-emea.rs-online.com/webdocs/1302/0900766b81302e21.pdf

## Free pads (board coordinates)
  round 2.4 hole 2.4 unplated mask+0: 0(-37,-35.5) 0(-21,0) 0(0,-21) 0(0,0)
  round 1 smd paste+0 mask+0.5: 1(-35,-38.5) 1(-14.7,22.4) 1(38.5,38.5)

## Via types
v1: diameter 1, hole 0.5, TOP to BOTTOM, tented both sides, 6 vias
v2: diameter 1, hole 0.5, TOP to BOTTOM, 3 vias
v3: diameter 1, hole 0.5, TOP to BOTTOM, tented bottom, 1 vias
v4: diameter 1.27, hole 0.711, TOP to BOTTOM, 1 vias

## Nets (pads, with @x,y where several pads share a name; then routed paths per layer and width w, separated by ;. In a path a pad name is that pad's centre, name@x,y a point inside that pad or via, vN(x,y) a via of type N, cw(c..) or ccw(c..) an arc to the next point about the centre after c; other vN are vias at no path point)
3.3V: 3V3.P$1 EP4CE6.2 EP4CE6.45 R2.2 | length 70.4
  TOP w0.5: v2(2.4,16.275) 2.496,16.179 2.496,13.774 2.754,13.516 R2.2
  VS w0.5: EP4CE6.2 -23.5,40.5 -3.6,40.5 0.58,36.32 0.58,30.22 1,29.8 ; v2(2.4,16.275) 2.4,22.1 1,23.5 1,29.8 ; EP4CE6.45 5.84,29.8 1,29.8
  other v3: -1.8,38.7
5V: 5VREG.OUT C1.A EP4CE6.24 EP4CE6.67 MONITOR.7 MONITOR.8 MONITOR.9 MONITOR.10 VBUS_Jumper.1 | length 5
  TOP w1: 5VREG.OUT 35.202,-14 35.602,-14.4 39.43,-14.4 C1.A
A2: ESP32.7 J5.7 | length 3.3
  TOP w0.3: J5.7 12.265,20.48 15.54,20.48 ESP32.7
A3: ESP32.8 J5.8 | length 3.6
  TOP w0.3: J5.8 12.011,17.94 15.54,17.94 ESP32.8
A4: ESP32.9 J5.9 | length 3.3
  TOP w0.3: J5.9 12.265,15.4 15.54,15.4 ESP32.9
A5: ESP32.10 J5.10 | length 3.6
  TOP w0.3: J5.10 12.011,12.86 15.54,12.86 ESP32.10
D2: D2.P$1 ESP32.16 | length 4.1
  BOTTOM w0.3: ESP32.16 15.555,-2.28 18.3,0.465 D2.P$1@18.3,0.55
D5: D5.P$1 ESP32.19 | length 2.5
  TOP w0.3: ESP32.19 35.883,2.708 38.343,2.708 D5.P$1
D6: D6.P$1 ESP32.20 | length 2.5
  TOP w0.3: ESP32.20 35.903,5.228 38.323,5.228 D6.P$1
D9: D9.P$1 ESP32.21 | length 2.5
  TOP w0.3: ESP32.21 35.885,7.785 38.34,7.785 D9.P$1
D10: D10.P$1 ESP32.22 | length 2.5
  TOP w0.3: ESP32.22 35.882,10.342 38.343,10.342 D10.P$1
D11: D11.P$1 EP4CE6.69 ESP32.23 | length 41.2
  TOP w0.3: ESP32.23 35.9,12.85 38.325,12.85 D11.P$1
  SIGNALS w0.3: EP4CE6.69 7.45,-2.29 9.757,-2.29 12.342,-4.875 18.125,-4.875 ESP32.23
D12: D12.P$1 EP4CE6.70 ESP32.24 | length 39
  TOP w0.3: ESP32.24 35.92,15.37 38.305,15.37 D12.P$1
  SIGNALS w0.3: EP4CE6.70 10.58,-0.98 13.65,-4.05 16.41,-4.05 ESP32.24
D13: ESP32.25 J6.4 | length 22.6
  TOP w0.5: ESP32.25 34.045,17.955 32.3,19.7 32.3,28.5 37.785,33.985 39.355,33.985 J6.4
Feather_3V3: ESP32.2@15.555,33.195 J5.2 | length 3.6
  TOP w0.3: J5.2 12.011,33.18 15.54,33.18 ESP32.2@15.555,33.195
Feather_AREF: ESP32.3 J5.3 | length 3.3
  TOP w0.3: J5.3 12.265,30.64 15.54,30.64 ESP32.3
Feather_EN: ESP32.27 J6.2 | length 9.8
  TOP w0.5: ESP32.27@35.84,23 ESP32.27 37.92,23.035 40.741,25.855 40.741,27.629 39.475,28.895 J6.2
Feather_RESET: ESP32.1 J5.1 | length 3.3
  TOP w0.3: J5.1 12.265,35.72 15.54,35.72 ESP32.1
GND: 5VREG.GND "PD SINK.4" "PD SINK.8" C1.C C2.2 EP4CE6.1 EP4CE6.23 EP4CE6.46 EP4CE6.68 ESP32.4 J1.01 J1.19 J2.01 J2.19 J3.01 J3.19 J4.01 J4.19 J5.4 LINK_A.1 LINK_B.1 Master.2 MONITOR.13 MONITOR.14 MONITOR.15 MONITOR.16 R1.2
  other v1: -37.9,-40.025 6.3,-39.9 39.5,-32.4 39.375,-5.4 -7.575,2.875 37.075,36.65
  other v4: 4.75,39.425
IO_1: "FPGA IO.3" EP4CE6.73 | length 43.1
  TOP w0.3: -6,-39.7 -4.3,-41.4 -2.5,-41.4 -0.9,-39.8 -0.9,-25.4 2.9,-21.6 2.9,-9.3 EP4CE6.73
IO_2: "FPGA IO.6" EP4CE6.74 | length 42.7
  BOTTOM w0.3: -3.46,-37.16 0.24,-37.16 3.3,-34.1 3.3,-5.625 4.095,-4.83 7.45,-4.83 EP4CE6.74
IO_3: "FPGA IO.4" EP4CE6.71 | length 40
  BOTTOM w0.3: -6,-37.16 2.1,-29.06 2.1,-5.225 3.805,-3.52 EP4CE6.71
IO_7: "FPGA IO.5" EP4CE6.72 | length 43.6
  SIGNALS w0.3: -3.46,-39.7 -1.2,-39.7 3.1,-35.4 3.1,-7.361 5.711,-4.75 7.45,-4.75 EP4CE6.72
IO_39: "FPGA IO.2" EP4CE6.60 | length 58.5
  BOTTOM w0.3: -8.54,-37.16 -8.75,-36.95 -8.75,-1.825 3.565,10.49 7.45,10.49 EP4CE6.60
IO_43: "FPGA IO.1" EP4CE6.58 | length 71.2
  SIGNALS w0.3: -8.54,-39.7 -11.2,-37.04 -11.2,7.8 -6.05,12.95 7.37,12.95 EP4CE6.58
MISC_SYNC: EP4CE6.57 LB.2 LINK_A.3 | length 22.1
  BOTTOM w0.3: LINK_A.3@-7.75,26.525 LINK_A.3 -7.75,23.75 -3.235,19.235 -1.426,19.235 -1.258,19.068 LB.2 -1.258,16.483 0.965,14.26 EP4CE6.57
MISO: EP4CE6.66 ESP32.13 MISO.P$1 | length 7.4
  TOP w0.3: EP4CE6.66 11.775,4.1 MISO.P$1 12.89,5.215 15.515,5.215 ESP32.13
MOSI: EP4CE6.64 ESP32.12 MOSI.P$1 | length 7.4
  TOP w0.3: EP4CE6.64 9.813,7.772 MOSI.P$1 15.532,7.772 ESP32.12
MS: EP4CE6.61 Master.1 R2.1 | length 48.7
  TOP w0.3: Master.1 -2.075,-29.671 -2.075,3.9 3.205,9.18 ; R2.1 2.825,9.56 3.205,9.18 ; EP4CE6.61 3.205,9.18
NetLA_1: LA.1 LINK_B.2 | length 19
  BOTTOM w0.3: LA.1 -7.242,21.742 -10.25,24.75 -10.25,29.25 -6.825,32.675 -5.75,32.675 -4.85,33.575 LINK_B.2
NetLB_1: LB.1 LINK_B.3 | length 15.8
  BOTTOM w0.3: LB.1 -0.242,19.068 LB.1@-0.03,19.28 ; -0.175,19.425 -0.175,19.575 -0.7,20.1 -2.975,20.1 -3.725,20.85 -3.725,23.85 -2.775,24.8 0,24.8 1.425,26.225 LINK_B.3
NetR1_1: R1.1 VS.- | length 2.3
  TOP w0.3: R1.1 0.547,-37.063 0.547,-39.137 VS.-
NetSlave_1: Slave.1 TP1.P$1 | length 2.2
  TOP w0.3: TP1.P$1 -3.761,-26.139 -3.761,-28.261 Slave.1
NetSlave_2: Slave.2 TP2.P$1 | length 2.2
  TOP w0.3: Slave.2 -6.559,-28.241 -6.559,-26.159 TP2.P$1
PD_A\L\E\R\T\: "PD SINK.11"
PD_D+: "PD SINK.10" D+.P$1 | length 4
  TOP w0.3: D+.P$1 31.85,-37.05 32.181,-37.381 32.181,-38.95 32.181,-39.916
PD_D-: "PD SINK.9" D-.P$1 | length 4
  TOP w0.3: 34.721,-39.916 34.721,-38.95 34.721,-38.35 34.897,-38.174 34.938,-38.174 34.961,-38.152 34.961,-37.747 34.938,-37.724 34.897,-37.724 34.721,-37.549 34.721,-37.166 34.973,-36.914 35.25,-36.637 D-.P$1
PD_G\P\I\O\: "PD SINK.13"
PD_RESET: "PD SINK.12"
PD_VIN: "PD SINK.7"
PDO2: "PD SINK.5" ESP32.6 J5.6 | length 74.1
  TOP w0.3: J5.6 12.011,23.02 15.54,23.02 ESP32.6 17.532,21.058 17.532,19.743 18.875,18.4 23.55,18.4 25.3,16.65 25.3,0.655 37.93,-11.975 40.2,-11.975 41.45,-13.225 41.45,-19.102 40.202,-20.35 30.5,-20.35 29.86,-20.99 29.86,-21.917 29.641,-22.136
PDO3: "PD SINK.6" ESP32.5 J5.5 | length 58.7
  TOP w0.3: J5.5 12.265,25.56 15.54,25.56 ESP32.5 ; 27.088,-22.123 27.101,-22.136
  BOTTOM w0.3: ESP32.5 17.532,23.598 17.532,19.943 19.05,18.425 23.9,18.425 27.101,15.224 27.101,-22.136
RXD: EP4CE6.63 ESP32.14 RX.P$1 | length 12.1
  TOP w0.3: EP4CE6.63 7.37,5.41 7.37,3.671 8.251,2.79 12.735,2.79 RX.P$1 12.87,2.695 15.535,2.695 ESP32.14
SCK: EP4CE6.62 ESP32.11 SCK.P$1 | length 14.7
  TOP w0.3: EP4CE6.62 9.725,10.225 SCK.P$1 12.905,10.28 15.5,10.28 ESP32.11
  SIGNALS w0.3: EP4CE6.62 9.835,10.335 ESP32.11
SCL: "PD SINK.1" ESP32.18 SCL.P$1 | length 27.6
  TOP w0.3: ESP32.18 SCL.P$1
  BOTTOM w0.3: ESP32.18 41.21,-5.16 41.21,-19.615 39.903,-20.922 39.903,-22.034 39.801,-22.136
SDA: "PD SINK.2" ESP32.17 SDA.P$1 | length 29
  TOP w0.3: ESP32.17 35.883,-2.357 38.343,-2.357 SDA.P$1
  BOTTOM w0.3: ESP32.17 36.142,-2.632 36.142,-3.392 38.075,-5.325 38.075,-12.975 34.875,-16.175 33.65,-16.175 32.75,-17.075 32.75,-19.425 33.75,-20.425 35.55,-20.425 37.261,-22.136
sigA1: EP4CE6.35 J2.17 | length 23.8
  SIGNALS w0.3: EP4CE6.35 -35.81,-14.91 -35.81,-16.649 -34.929,-17.53 -33.991,-17.53 -29.26,-22.26 -29.26,-24.49 -23.829,-29.921 J2.17
sigA2: EP4CE6.34 J2.16 | length 24.4
  BOTTOM w0.3: EP4CE6.34 -31.85,-13.79 -31.85,-18.798 -24.498,-26.15 -21.008,-26.15 J2.16
sigA3: EP4CE6.44 J4.17 | length 75.1
  5V w0.3: EP4CE6.44 -30.765,-23.84 -28.525,-21.6 -28.525,-12.9 -23.5,-7.875 -18.075,-7.875 1.625,-27.575 17.364,-27.575 J4.17
sigA4: EP4CE6.41 J4.16 | length 81.3
  5V w0.3: EP4CE6.41 -38.475,-22.735 -38.475,-25.225 -28.815,-34.885 24.94,-34.885 25.8,-34.025 25.8,-30.931 J4.16
sigA5: EP4CE6.31 J2.13 | length 22.9
  SIGNALS w0.3: EP4CE6.31 -35.81,-9.83 -35.81,-11.569 -35.009,-12.37 -34.071,-12.37 -27.82,-18.62 -27.82,-19.338 J2.13
sigA6: EP4CE6.30 J2.12 | length 24.5
  BOTTOM w0.3: EP4CE6.30 -29.7,-10.86 -29.7,-16.025 -24.725,-21 -21.078,-21 J2.12
sigA7: EP4CE6.40 J4.13 | length 70.8
  5V w0.3: EP4CE6.40 -31.25,-15.51 -31.25,-11.275 -24.8,-4.825 -13.725,-4.825 3.98,-22.53 12.005,-22.53 14.316,-24.841 J4.13
sigA8: EP4CE6.37 J4.12 | length 101.9
  5V w0.3: EP4CE6.37 -37.345,-16.22 -40.375,-19.25 -40.375,-28.375 -33.025,-35.725 28.3,-35.725 28.95,-35.075 28.95,-29.001 J4.12
sigA9: EP4CE6.27 J2.09 | length 22.9
  SIGNALS w0.3: EP4CE6.27 -35.81,-4.75 -35.81,-6.489 -35.009,-7.29 -34.071,-7.29 -27.368,-13.993 -27.368,-14.71 J2.09
sigA10: EP4CE6.26 J2.08 | length 25.3
  BOTTOM w0.3: EP4CE6.26 -33.195,-0.98 -27.225,-6.95 -27.225,-13.45 -24.8,-15.875 -21.123,-15.875 J2.08
sigA11: EP4CE6.87 J4.09 | length 15.3
  TOP w0.3: EP4CE6.87 7.45,-22.53 9.189,-22.53 11.958,-19.761 J4.09
sigA12: EP4CE6.86 J4.08 | length 15.3
  BOTTOM w0.3: EP4CE6.86 16.503,-21.3 19.222,-18.581 20.89,-18.581 J4.08
sigA13: EP4CE6.21 J2.05 | length 25.4
  SIGNALS w0.3: EP4CE6.21 -35.81,2.87 -35.81,1.131 -34.929,0.25 -33.991,0.25 -28.259,-5.482 -28.259,-8.739 J2.05
sigA14: EP4CE6.20 J2.04 | length 24.9
  BOTTOM w0.3: EP4CE6.20 -21.05,-6.81 -21.05,-10.375 -19.986,-11.439 -19.986,-11.932 J2.04
sigA15: EP4CE6.83 J4.05 | length 15.3
  TOP w0.3: EP4CE6.83 7.45,-17.45 9.189,-17.45 11.958,-14.681 J4.05
sigA16: EP4CE6.82 J4.04 | length 15.3
  BOTTOM w0.3: EP4CE6.82 16.503,-16.22 19.222,-13.501 20.89,-13.501 J4.04
sigA17: EP4CE6.17 J1.17 | length 15.9
  TOP w0.3: EP4CE6.17 -35.73,10.49 -33.991,10.49 -32.422,12.059 J1.17
sigA18: EP4CE6.16 J1.16 | length 17
  BOTTOM w0.3: EP4CE6.16 -29.08,11.72 -24.85,15.95 -21.128,15.95 J1.16
sigA19: EP4CE6.80 J3.17 | length 31.3
  TOP w0.3: EP4CE6.80 20.888,-1.472 20.888,10.879 J3.17
sigA20: EP4CE6.77 J3.16 | length 37.1
  BOTTOM w0.3: EP4CE6.77 7.45,-9.83 12.045,-9.83 24.65,2.775 24.65,12.197 J3.16
sigA21: EP4CE6.13 J1.13 | length 15.9
  TOP w0.3: EP4CE6.13 -35.73,15.57 -33.991,15.57 -32.422,17.139 J1.13
sigA22: EP4CE6.12 J1.12 | length 17
  BOTTOM w0.3: EP4CE6.12 -29.65,16.8 -25.45,21 -21.098,21 J1.12
sigA23: EP4CE6.76 J3.13 | length 31.8
  TOP w0.3: EP4CE6.76 11.256,-8.6 17.375,-2.481 17.375,14.805 J3.13
sigA24: EP4CE6.48 J3.12 | length 44.1
  BOTTOM w0.3: EP4CE6.48 7.45,28.19 7.45,35.225 11.325,39.1 17.075,39.1 20.888,35.287 20.888,26.99 21.884,25.995 23.655,25.995 24.05,25.6 24.05,21.48 J3.12
sigA25: EP4CE6.9 J1.09 | length 15.9
  TOP w0.3: EP4CE6.9 -35.73,20.65 -33.991,20.65 -32.422,22.219 J1.09
sigA26: EP4CE6.8 J1.08 | length 17
  BOTTOM w0.3: EP4CE6.8 -29.47,21.88 -25.325,26.025 -21.043,26.025 J1.08
sigA27: EP4CE6.55 J3.09 | length 44.7
  TOP w0.3: EP4CE6.55 7.37,18.03 9.109,18.03 10.576,19.497 10.576,36.039 11.787,37.25 16.175,37.25 17,36.425 17,24.927 J3.09
sigA28: EP4CE6.54 J3.08 | length 42.1
  BOTTOM w0.3: EP4CE6.54 10.025,20.685 10.025,36.975 11.35,38.3 16.175,38.3 17.675,36.8 17.675,27.375 19.075,25.975 21.032,25.975 J3.08
sigA29: EP4CE6.5 J1.05 | length 15.9
  TOP w0.3: EP4CE6.5 -35.73,25.73 -33.991,25.73 -32.422,27.299 J1.05
sigA30: EP4CE6.4 J1.04 | length 17
  BOTTOM w0.3: EP4CE6.4 -29.59,26.96 -25.375,31.175 -21.35,31.175 -20.014,29.839 J1.04
sigA31: EP4CE6.51 J3.05 | length 38.2
  TOP w0.3: EP4CE6.51 7.45,23.19 7.45,35.25 11.325,39.125 17.304,39.125 17.975,38.454 17.975,29.032 J3.05
sigA32: EP4CE6.50 J3.04 | length 41
  BOTTOM w0.3: EP4CE6.50 7.45,25.65 7.45,27.389 6.649,28.19 5.235,28.19 4.525,28.9 4.525,33.35 11.2,40.025 17.725,40.025 24.075,33.675 24.075,31.665 J3.04
sigB1: EP4CE6.33 J2.15 | length 22.9
  SIGNALS w0.3: EP4CE6.33 -35.81,-12.37 -35.81,-14.109 -35.009,-14.91 -34.071,-14.91 -28.299,-20.682 -28.299,-21.399 J2.15
sigB2: EP4CE6.36 J2.18 | length 24.1
  BOTTOM w0.3: EP4CE6.36 -32.825,-15.355 -32.825,-19.8 -23.95,-28.675 -21.023,-28.675 J2.18
sigB3: EP4CE6.42 J4.15 | length 72.9
  5V w0.3: EP4CE6.42 -32.925,-21.3 -30.15,-18.525 -30.15,-12.075 -24.375,-6.3 -17.5,-6.3 -1.49,-22.31 ccw(c-0.27,-21.155) -1.425,-22.375 2.35,-26.15 18.182,-26.15 19.413,-27.381 J4.15
sigB4: EP4CE6.43 J4.18 | length 71
  5V w0.3: EP4CE6.43 -26.505,-34.375 23.756,-34.375 24.31,-33.821 24.31,-31.41 23.032,-30.132 22.461,-30.132 J4.18
sigB5: EP4CE6.29 J2.11 | length 22.9
  SIGNALS w0.3: EP4CE6.29 -35.81,-7.29 -35.81,-9.029 -35.009,-9.83 -34.071,-9.83 -27.638,-16.263 -27.638,-16.98 J2.11
sigB6: EP4CE6.32 J2.14 | length 24.5
  BOTTOM w0.3: EP4CE6.32 -30.698,-12.402 -30.698,-17.527 -24.65,-23.575 -21.043,-23.575 J2.14
sigB7: EP4CE6.38 J4.11 | length 70.3
  5V w0.3: EP4CE6.38 -32.475,-14.195 -32.475,-9.275 -26.575,-3.375 -12.05,-3.375 4.645,-20.07 9.189,-20.07 9.194,-20.075 13.025,-20.075 15.251,-22.301 J4.11
sigB8: EP4CE6.39 J4.14 | length 91
  5V w0.3: EP4CE6.39 -39.6,-21.32 -39.6,-26.425 -30.72,-35.305 26.395,-35.305 26.95,-34.75 26.95,-29.541 J4.14
sigB9: EP4CE6.25 J2.07 | length 22.9
  SIGNALS w0.3: EP4CE6.25 -35.81,-2.21 -35.81,-3.949 -35.009,-4.75 -34.071,-4.75 -27.048,-11.773 -27.048,-12.49 J2.07
sigB10: EP4CE6.28 J2.10 | length 25.2
  BOTTOM w0.3: EP4CE6.28 -34.445,-3.575 -33.3,-3.575 -28.625,-8.25 -28.625,-14.6 -24.775,-18.45 -21.088,-18.45 J2.10
sigB11: EP4CE6.85 J4.07 | length 15.3
  TOP w0.3: EP4CE6.85 7.45,-19.99 9.189,-19.99 11.958,-17.221 J4.07
sigB12: EP4CE6.88 J4.10 | length 15.3
  BOTTOM w0.3: EP4CE6.88 16.503,-23.84 19.222,-21.121 20.89,-21.121 J4.10
sigB13: EP4CE6.19 J2.03 | length 25.9
  SIGNALS w0.3: EP4CE6.19 -35.81,5.41 -34.071,5.41 -25.9,-2.761 -25.9,-8.558 J2.03
sigB14: EP4CE6.22 J2.06 | length 26.3
  BOTTOM w0.3: EP4CE6.22 -25.8,-4.6 -25.8,-11.075 -23.425,-13.45 -21.008,-13.45 J2.06
sigB15: EP4CE6.81 J4.03 | length 15.3
  TOP w0.3: EP4CE6.81 7.45,-14.91 9.189,-14.91 11.958,-12.141 J4.03
sigB16: EP4CE6.84 J4.06 | length 15.3
  BOTTOM w0.3: EP4CE6.84 16.503,-18.76 19.222,-16.041 20.89,-16.041 J4.06
sigB17: EP4CE6.15 J1.15 | length 15.9
  TOP w0.3: EP4CE6.15 -35.73,13.03 -33.991,13.03 -32.422,14.599 J1.15
sigB18: EP4CE6.18 J1.18 | length 15.9
  BOTTOM w0.3: EP4CE6.18 -34.27,9.41 -33.765,9.41 -33.724,9.45 -26.52,9.45 -25.145,10.825 -21.01,10.825 J1.18
sigB19: EP4CE6.78 J3.15 | length 31
  TOP w0.3: EP4CE6.78 8.725,-11.095 9.88,-11.095 18.375,-2.6 18.375,13.265 J3.15
sigB20: EP4CE6.75 J3.18 | length 31.7
  BOTTOM w0.3: EP4CE6.75 7.45,-7.29 12.935,-7.29 23.65,3.425 23.65,10.657 J3.18
sigB21: EP4CE6.11 J1.11 | length 15.9
  TOP w0.3: EP4CE6.11 -35.73,18.11 -33.991,18.11 -32.422,19.679 J1.11
sigB22: EP4CE6.14 J1.14 | length 17
  BOTTOM w0.3: EP4CE6.14 -29.465,14.26 -25.275,18.45 -21.088,18.45 J1.14
sigB23: EP4CE6.47 J3.11 | length 46.6
  TOP w0.3: EP4CE6.47 4.4,28.7 4.4,34.325 10.151,40.076 18.024,40.076 18.528,39.572 18.528,29.35 19.31,28.569 20.107,28.569 20.888,27.788 20.888,21.73 20.342,21.184 20.342,20.61 19.708,19.976 J3.11
sigB24: EP4CE6.79 J3.14 | length 43
  BOTTOM w0.3: EP4CE6.79 7.45,-12.37 11.88,-12.37 25.75,1.5 25.75,13.637 J3.14
sigB25: EP4CE6.7 J1.07 | length 15.9
  TOP w0.3: EP4CE6.7 -35.73,23.19 -23.885,23.19 J1.07
sigB26: EP4CE6.10 J1.10 | length 17
  BOTTOM w0.3: EP4CE6.10 -29.51,19.34 -25.325,23.525 -21.083,23.525 J1.10
sigB27: EP4CE6.53 J3.07 | length 42
  TOP w0.3: EP4CE6.53 7.37,20.57 9.109,20.57 9.95,21.411 9.95,36.725 11.475,38.25 16.525,38.25 17.508,37.267 17.508,26.96 J3.07
sigB28: EP4CE6.56 J3.10 | length 45.2
  BOTTOM w0.3: EP4CE6.56 10.576,18.696 10.576,36.451 11.675,37.55 15.9,37.55 17,36.45 17,25.75 19.225,23.525 20.942,23.525 J3.10
sigB29: EP4CE6.3 J1.03 | length 15.9
  TOP w0.3: EP4CE6.3 -35.73,28.27 -33.991,28.27 -32.422,29.839 J1.03
sigB30: EP4CE6.6 J1.06 | length 17
  BOTTOM w0.3: EP4CE6.6 -29.305,24.42 -25.125,28.6 -21.078,28.6 J1.06
sigB31: EP4CE6.49 J3.03 | length 42.6
  TOP w0.3: EP4CE6.49 3.175,27.385 3.175,35.875 8.275,40.975 18.35,40.975 20.888,38.437 20.888,31.019 J3.03
sigB32: EP4CE6.52 J3.06 | length 57.5
  BOTTOM w0.3: EP4CE6.52 7.45,23.11 5.276,23.11 4.775,23.611 4.775,27.8 1.1,31.475 1.1,37.45 4.688,41.037 19.112,41.037 25.863,34.287 25.863,30.913 J3.06
SYNC: EP4CE6.59 LA.2 LINK_A.2 | length 39.4
  BOTTOM w0.3: LINK_A.2 -15.85,20.6 -14,18.75 LA.2 -8.258,17.508 -2.47,11.72 EP4CE6.59
TXD: EP4CE6.65 ESP32.15 TX.P$1 | length 12.1
  TOP w0.3: EP4CE6.65 7.37,2.87 7.37,1.131 8.251,0.25 12.775,0.25 TX.P$1 15.53,0.15 ESP32.15
VBAT: ESP32.28 J6.1 | length 3.7
  TOP w0.5: ESP32.28 37.938,25.575 38.848,26.485 J6.1
VBUS_Feather: ESP32.26 J6.3 VBUS_Jumper.2 | length 16.2
  TOP w0.5: ESP32.26 35.899,20.519 39.276,20.519 VBUS_Jumper.2 39.3,23.502 41.225,25.427 41.225,25.463 41.361,25.599 41.361,29.425 J6.3
VDD: "PD SINK.3"
VS: 5VREG.IN "PD SINK.14" C2.1 J1.02 J1.20 J2.02 J2.20 J3.02 J3.20 J4.02 J4.20 MONITOR.1 MONITOR.2 MONITOR.3 MONITOR.4 VS.+ | length 15.9
  TOP w0.5: VS.+@2.445,-39.061 2.584,-39.2 3.665,-39.2 4.465,-38.4 v2(4.6,-38.4) ; v2(24.9,-16.275) 24.9,-16.14 25.301,-15.738 25.301,-15.024 25.559,-14.766 C2.1
  TOP w2: 6.963,-29.557 7.162,-29.756 7.527,-29.391 9.559,-29.391 9.575,-29.375
  5V w2: 6.963,-29.557 7.162,-29.756 9.194,-29.756 9.575,-29.375
  SIGNALS w2: 6.963,-29.557 7.162,-29.756 9.194,-29.756 9.575,-29.375
  BOTTOM w2: 6.963,-29.557 7.162,-29.756 7.527,-29.391 9.559,-29.391 9.575,-29.375
pads on no net: ESP32.2@34.605,39.545 ESP32.MH1 LINK_A. LINK_A.4 LINK_A.5 LINK_B. LINK_B.4 LINK_B.5 MONITOR.5 MONITOR.6 MONITOR.11 MONITOR.12

## Polygon pours and split planes (outlines as drawn)
VS on VS "VS" (solid, remove dead copper, pour order 0): -39.551,40.325 39.575,40.325 39.575,-40.275 -39.527,-40.275
GND on TOP "GNDNet" (solid, remove dead copper, pour order 2): -39.551,40.325 39.575,40.325 39.575,-40.275 -39.527,-40.275
5V on 5V "5V" (solid, remove dead copper, pour order 7): -39.551,40.325 39.575,40.325 39.575,-40.275 -39.527,-40.275
GND on GND "GND" (solid, remove dead copper, pour order 8): -39.551,40.325 39.575,40.325 39.575,-40.275 -39.527,-40.275
GND on BOTTOM "GND" (solid, remove dead copper, pour order 9): -39.551,40.325 39.575,40.325 39.575,-40.275 -39.527,-40.275

## Keep-outs
Keep-Out Layer:
  circle w0.5: c34.605,39.545 r2.105
  circle w0.5: c-37,-35.5 r1.45
  circle w0.5: c-21,0 r1.45
  circle w0.5: c0,0 r1.45
  circle w0.5: c0,-21 r1.45
  lines w0.1: -42,36.775 -42,22.025 cw(c-42,21.025) -42,20.025 -42,1 cw(c-42,0) -42,-1 -42,-20 cw(c-42,-21) -42,-22 -42,-36.75 ccw(c-36.775,-36.775) -36.8,-42 ; -42,36.8 cw(c-36.775,36.775) -36.75,42 -22,42 20.025,42 ccw(c21.025,42) 22.025,42 36.775,42 cw(c36.75,36.775) 41.975,36.75 41.975,22 ccw(c41.975,21) 41.975,20 41.975,1 ccw(c41.975,0) 41.975,-1 41.975,-20.025 ccw(c41.975,-21.025) 41.975,-22.025 41.927,-39.256 cw(c39.245,-39.243) 39.233,-41.925 22,-42 ccw(c21,-42) 20,-42 1,-42 ccw(c0,-42) -1,-42 -20.025,-42 ccw(c-21.025,-42) -22.025,-42 -36.775,-42

## Other copper
BOTTOM:
  text "PCB by Ben Kazemi for MSD Group @ UCL" at -40.217,-39.55 h1 r270

## Silkscreen, mask and mechanical layers (free items; w line width, h text height)
Top Overlay:
  lines w0.1: -7.9,-29.7 -2.4,-29.7 -2.4,-26.9 -7.9,-26.9 -7.9,-29.7 ; -7.882,-32.7 -2.382,-32.7 -2.382,-29.9 -7.882,-29.9 -7.882,-32.7
  lines w0.2: 11.575,4.988 10.7,4.112 10.7,-9.425 14.2,-12.925 ; 12.15,11.35 12.15,11.325 11.575,10.75 11.575,-0.775 12.2,-1.4 ; 12.85,1.078 ccw(c12.85,0.125) 12.917,-0.826 ; 12.85,3.628 ccw(c12.85,2.675) 12.917,1.724 ; 12.85,6.128 ccw(c12.85,5.175) 12.917,4.224 ; 12.85,8.703 ccw(c12.85,7.75) 12.917,6.799 ; 12.85,11.153 ccw(c12.85,10.2) 12.917,9.249 ; 14.75,-8.3 14.2,-8.85 14.2,-17 14.85,-17.65 ; 33.475,20.05 34.225,20.05 34.65,19.625 34.65,18.675 34.175,18.2 33.5,18.2 ; 34.65,19.15 38.61,19.15
  lines w0.3: -10.5,-28.2 -8.2,-28.2 -7.81,-28.2 ; -10.482,-31.2 -8.182,-31.2 -7.792,-31.2 -8.592,-30.4 ; -8.61,-27.4 -7.81,-28.2 ; -8.6,-29 -7.81,-28.21 -7.81,-28.2 ; -8.582,-32 -7.792,-31.21
  lines w2: -42,-2.016 ccw(c-42,0) -42,2.016
  text "RESET" at 17.125,35.25 h1
  text "D13" at 34.3,33.8 h1
  text "3V3" at 17,33.475 h1
  text "VBUS" at 33.2,31.425 h1
  text "Top" at -9.1,31.183 h1
  text "AREF" at 16.95,30.425 h1
  text "EN" at 35.05,29.35 h1
  text "GND" at 16.95,28.075 h1
  text "VBAT" at 33.125,27.55 h1
  text "Bottom" at -10.1,25.85 h1
  text "PD03" at 16.95,25.375 h1
  text "PD02" at 16.95,22.925 h1
  text "A2" at 16.95,20.025 h1
  text "A3" at 16.95,17.5 h1
  text "A4" at 16.95,14.95 h1
  text "D12" at 39.25,14.825 h1
  text "A5" at 16.95,12.35 h1
  text "D11" at 39.25,12.325 h1
  text "D10" at 39.25,9.9 h1
  text "D9" at 39.25,7.325 h1
  text "J3" at 20,7.3 h1
  text "J1" at -21.9,7.2 h1
  text "D6" at 39.25,4.725 h1
  text "D5" at 39.25,2.2 h1
  text "SCL" at 40.45,-1 h1 r90
  text "SDA" at 39.15,-2.85 h1
  text "PCB by Ben Kazemi for MSD Group @ UCL" at -40.392,-3.425 h1 r270
  text "J2" at -21.6,-7.4 h1
  text "TXD" at 14.575,-10.251 h1
  text "RXD" at 14.575,-11.919 h1
  text "MISO" at 14.575,-13.588 h1
  text "MOSI" at 14.575,-15.256 h1
  text "SCK" at 14.575,-16.925 h1
  text "Rev 2" at -36.15,-29.65 h1
  text "J4" at 20,-35 h1
  text "GND" at -32.4,-35.4 h1
  text "5V" at -24.3,-35.4 h1
  text "VS" at -16.8,-35.4 h1
  text "39" at -9.4,-35.69 h1
  text "3" at -6.3,-35.69 h1
  text "2" at -3.895,-35.69 h1
  text "PD_GPIO" at 24.933,-38.6 h1 r90
  text "PD_RESET" at 27.433,-38.6 h1 r90
  text "PD_ALERT" at 29.933,-38.6 h1 r90
  text "D+" at 31.4,-38.6 h1
  text "D-" at 34,-38.6 h1
  text "VIN" at 40.2,-38.6 h1 r90
  text "43" at -12,-40.3 h1
  text "7" at -1.5,-40.3 h1
  text "1" at -4.9,-41.8 h1
Bottom Overlay:
  lines w0.6: -26.375,-12.425 -38.7,-0.1 ; -26.375,12.225 -38.7,-0.1 ; -2.9,-0.1 -38.7,-0.1
  lines w2: -42,-2 ccw(c-42,0.016) -42,2.031
  text "LINK_A" at -9,40.767 h1
  text "LINK_B" at 1.9,40.767 h1
  text "Orientation Marker" at -4.954,1.404 h1.52
Bottom Mask:
  text "PCB by Ben Kazemi for MSD Group @ UCL" at -40.217,-39.55 h1 r270

## Text inside footprints (layer, text, board x,y; h text height)
ESP32: Top Overlay "ANTENNA" at 30.571,-5.709 h1.52 r180
"PD SINK": Top Overlay "--> USB IN" at 40.696,-30.891 h1.1 r180; Top Overlay "GND" at 14.446,-34.241 h1 r90